# Altium PCB 蓝油白字-motor-270pcs.PcbDoc (part 1 of 2)
Units mm, origin at the board's own origin, x right, y up, seen from the top; angles counter-clockwise.
Board outline 110 x 100 mm, 4 copper layers (Top Layer, GND-A, VCC-A, Bottom Layer); 281 components, 152 nets, 782 pads, 404 vias.
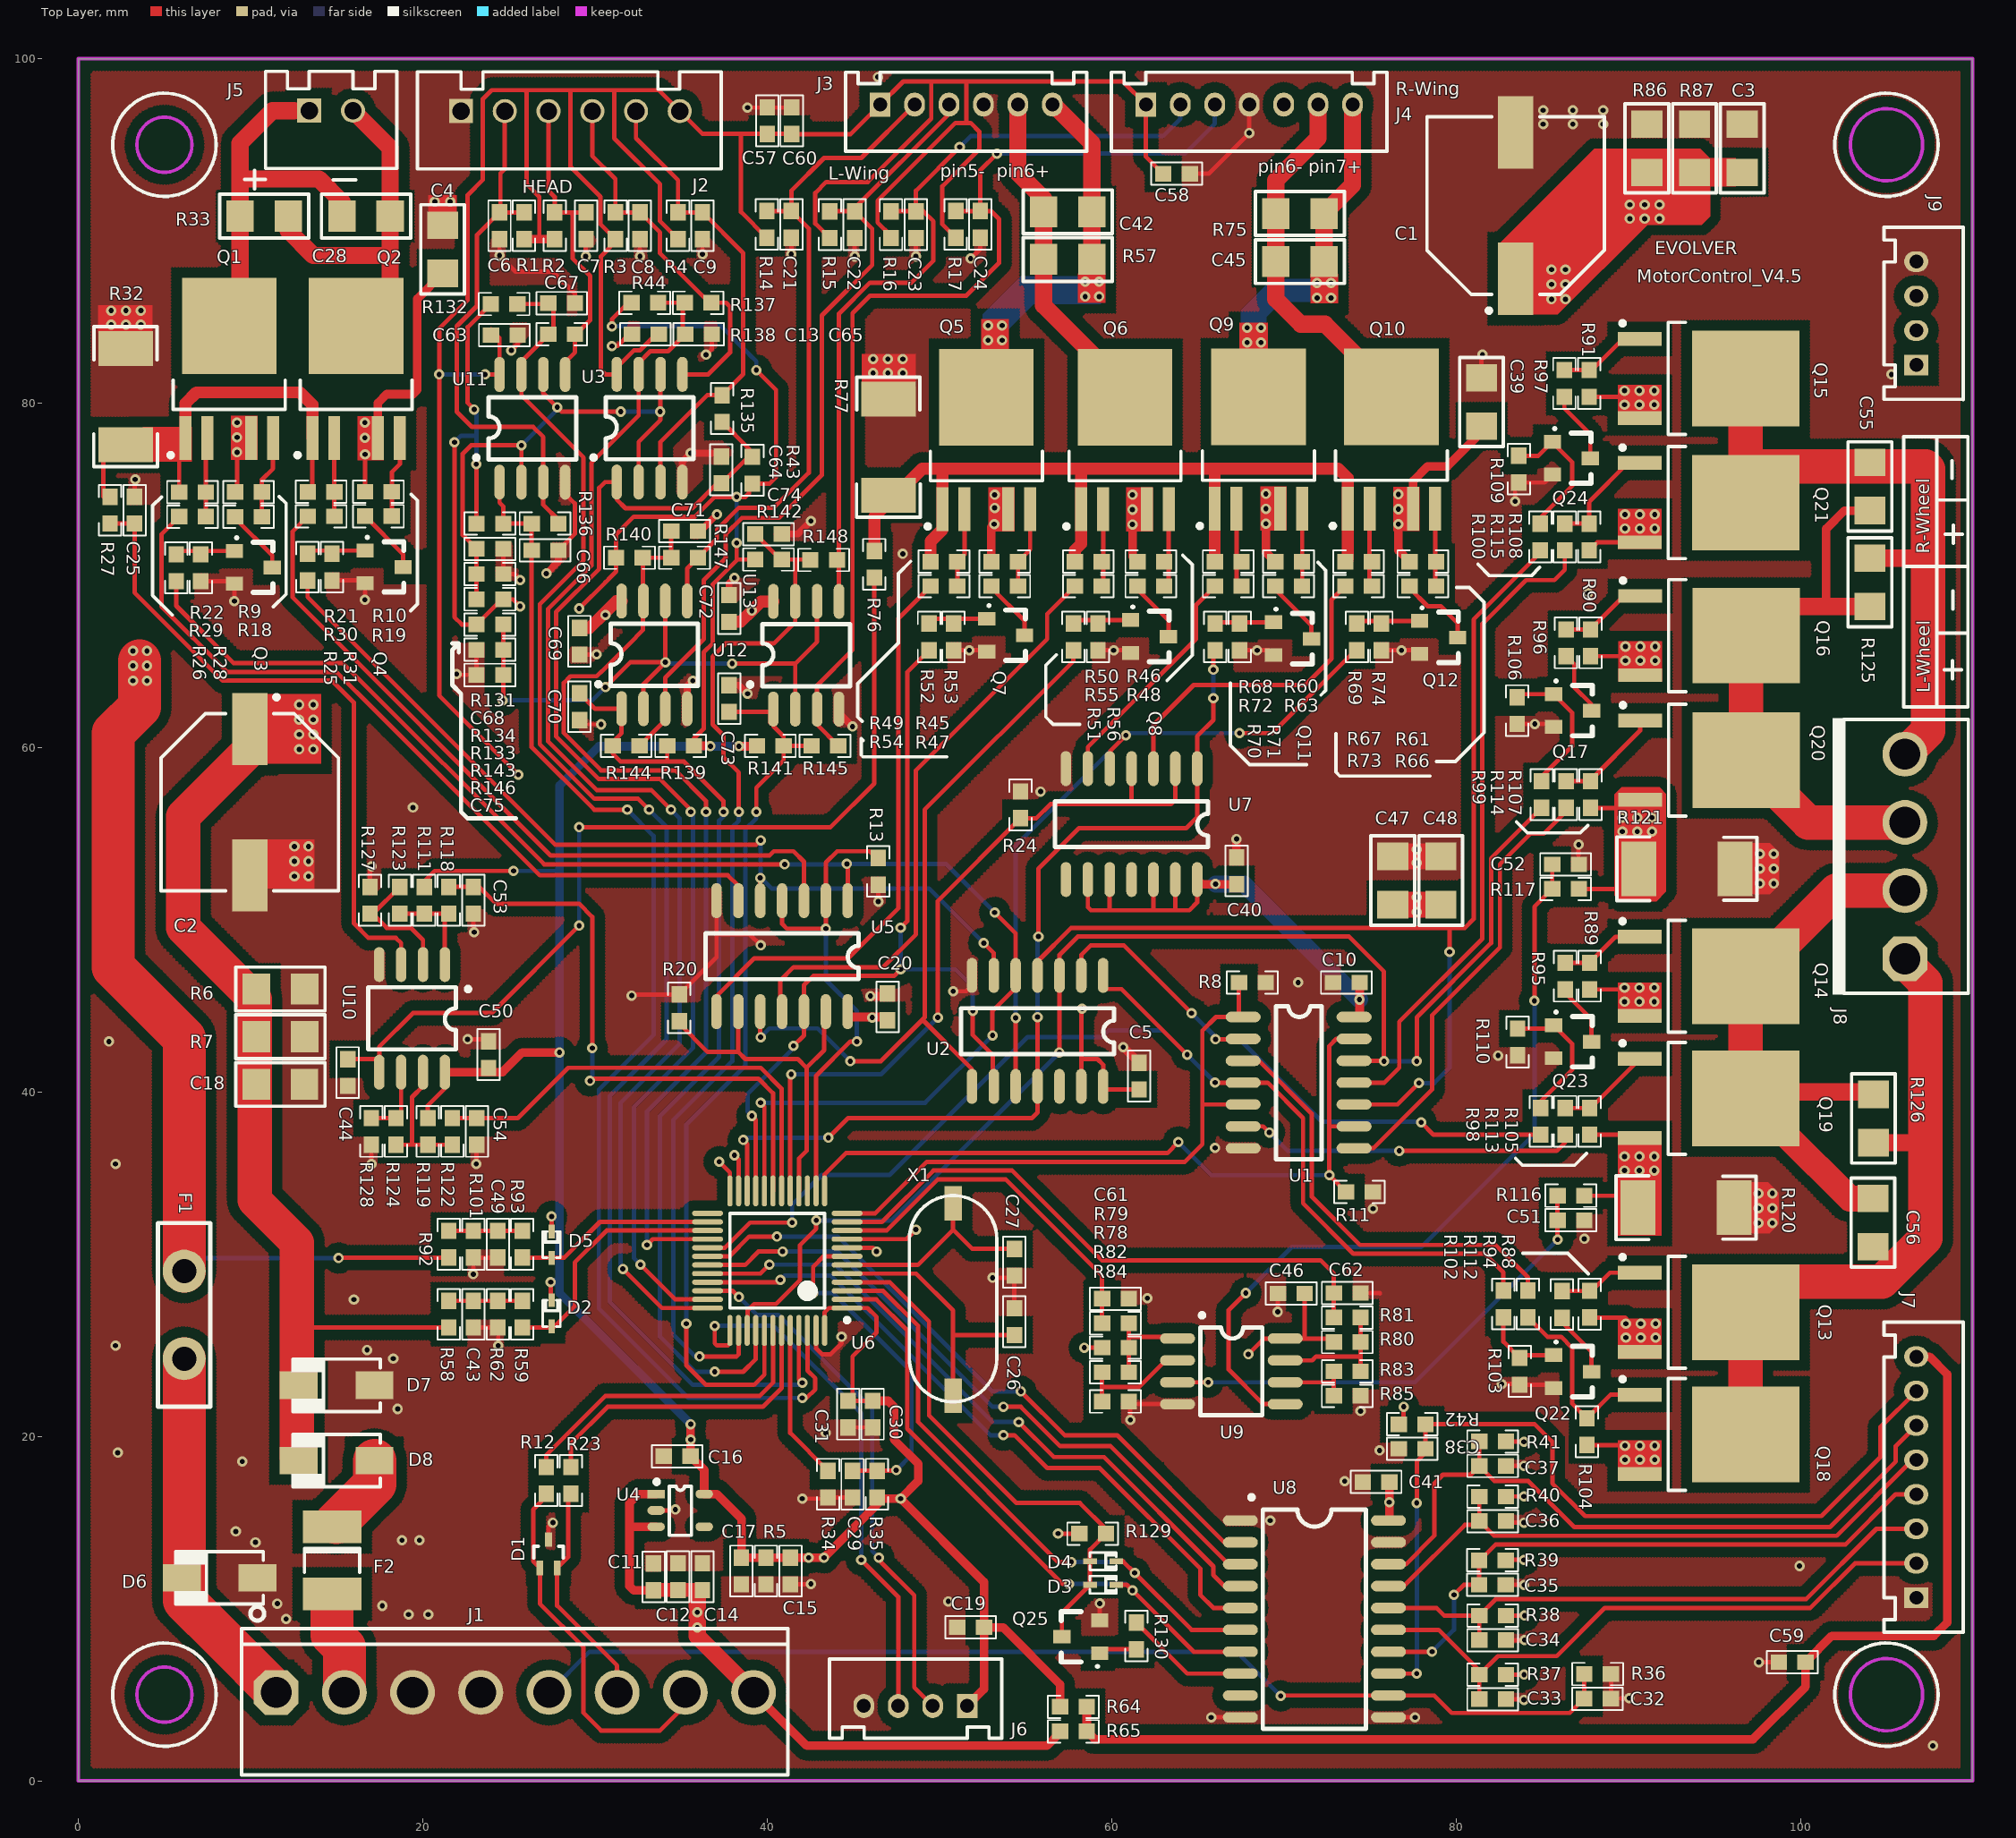
[diagram p0: Top Layer view]
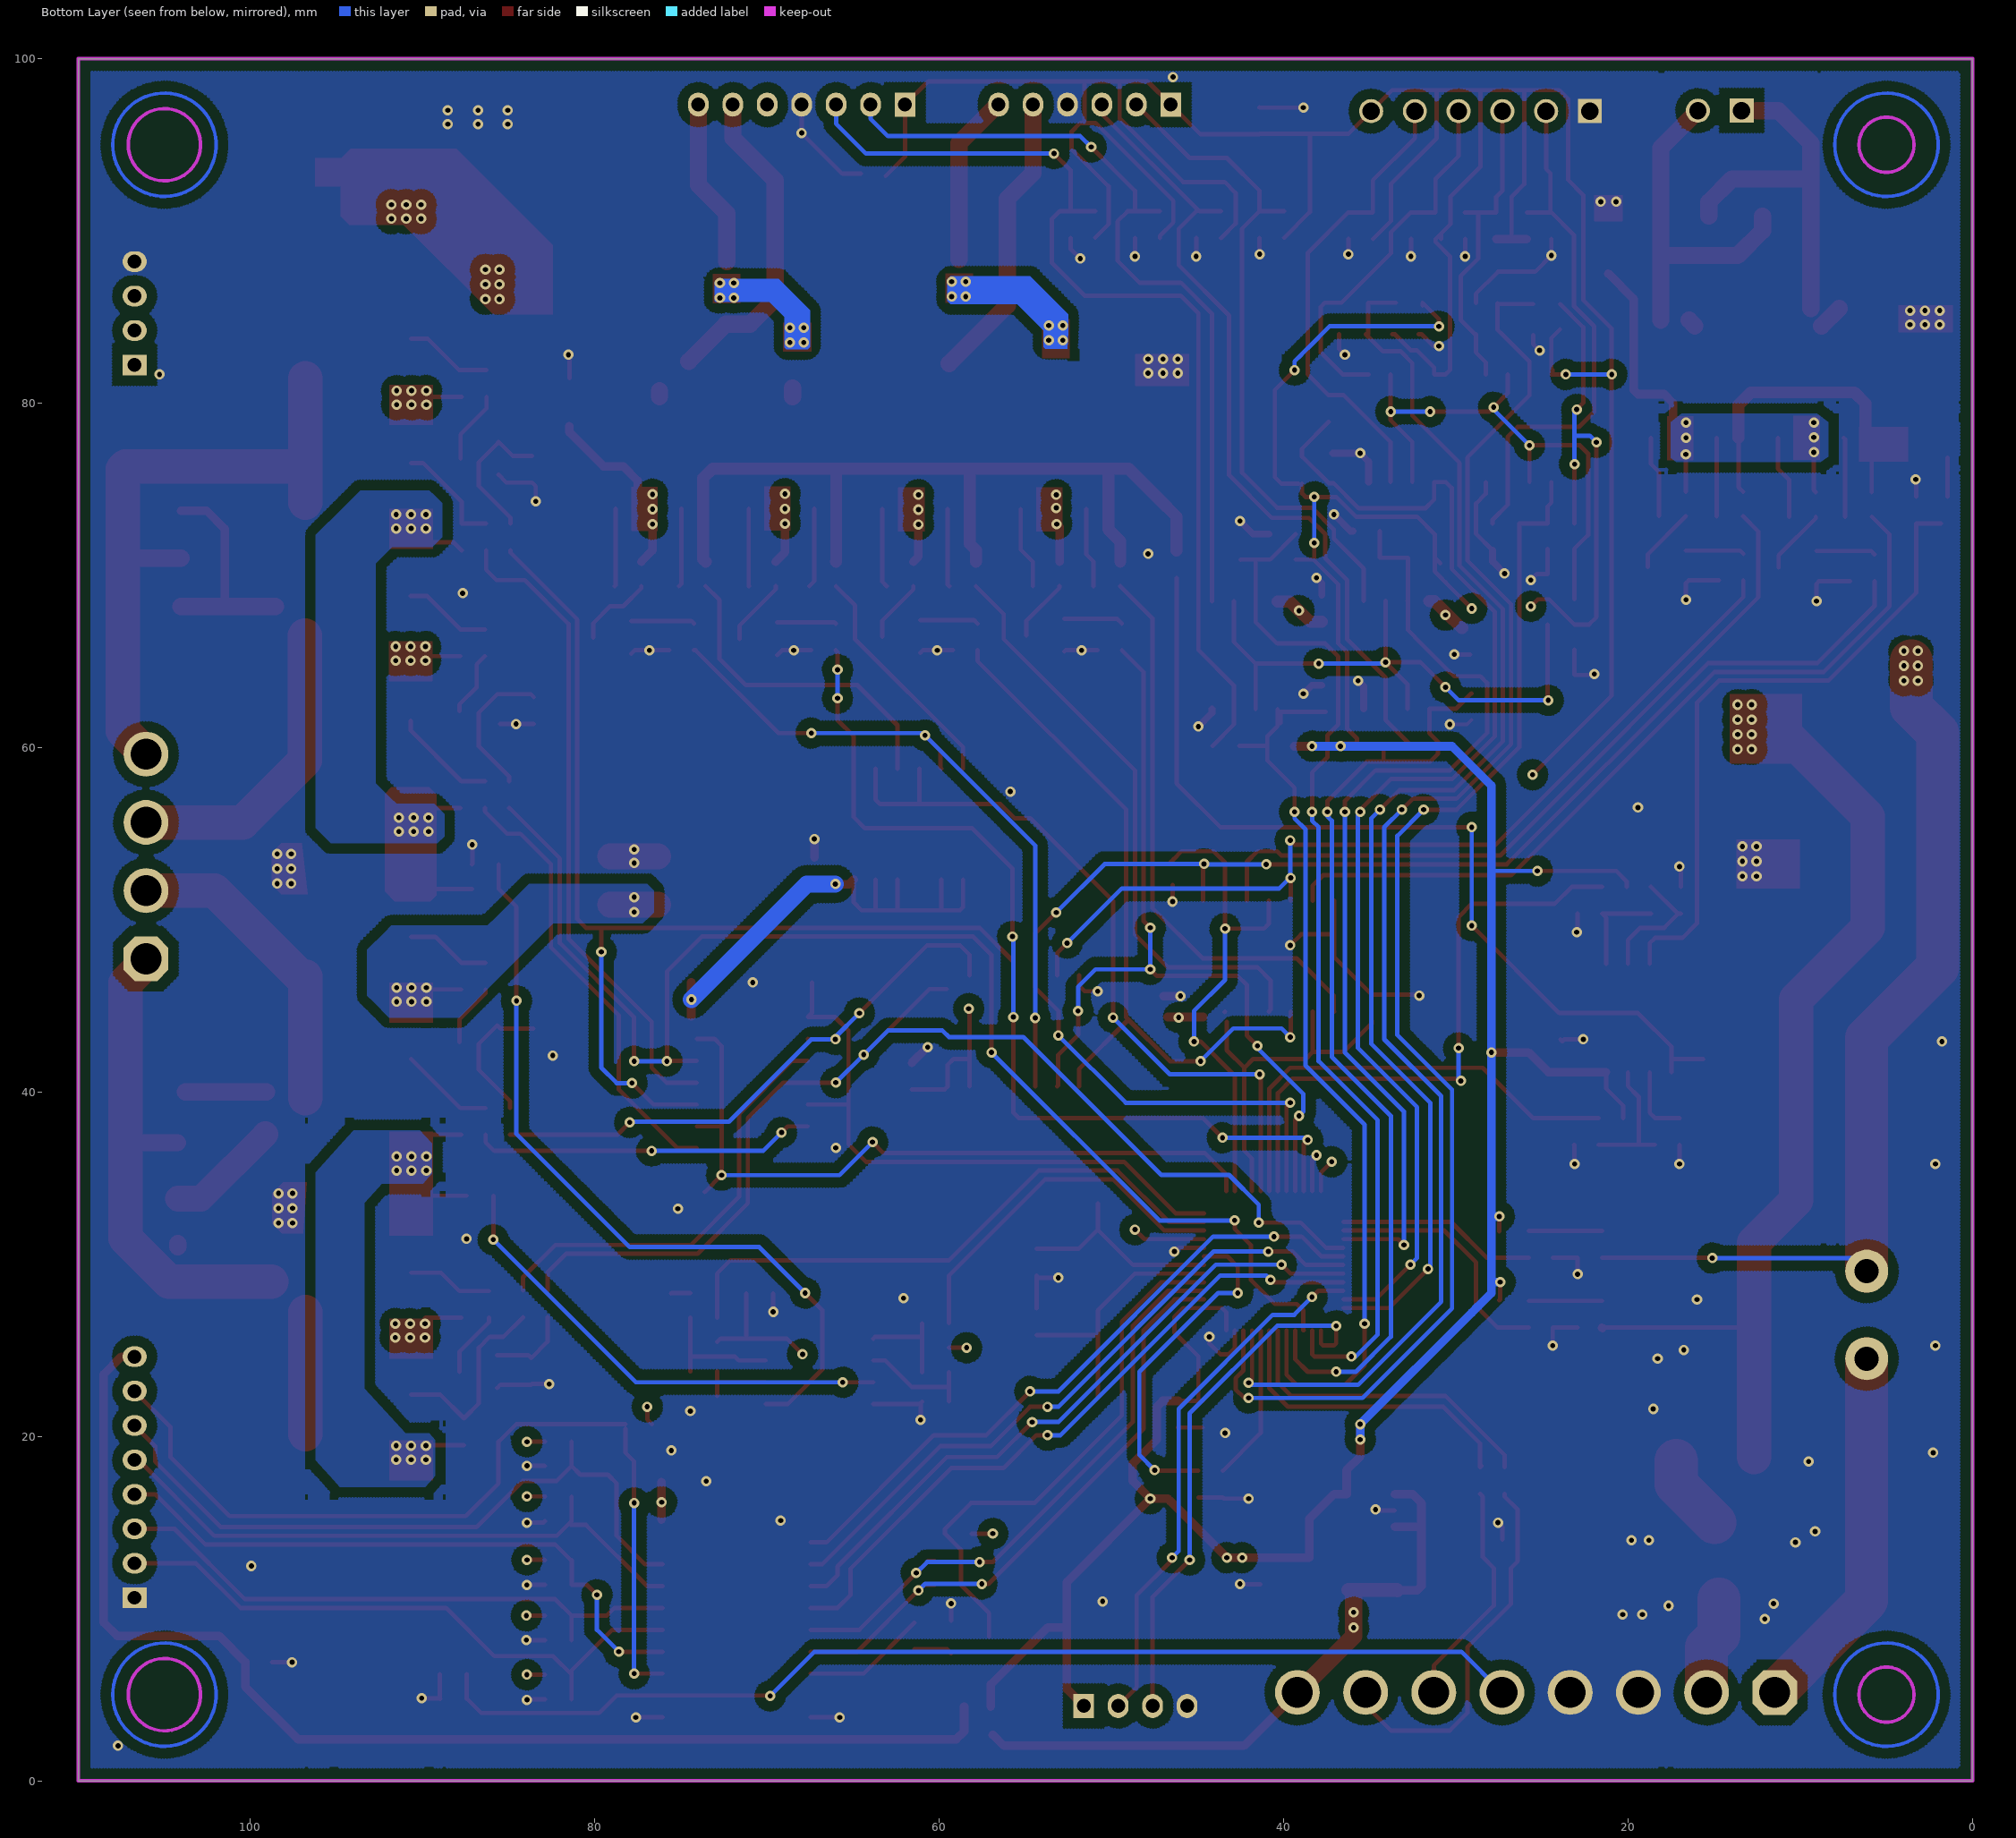
[diagram p1: Bottom Layer view, seen from below]
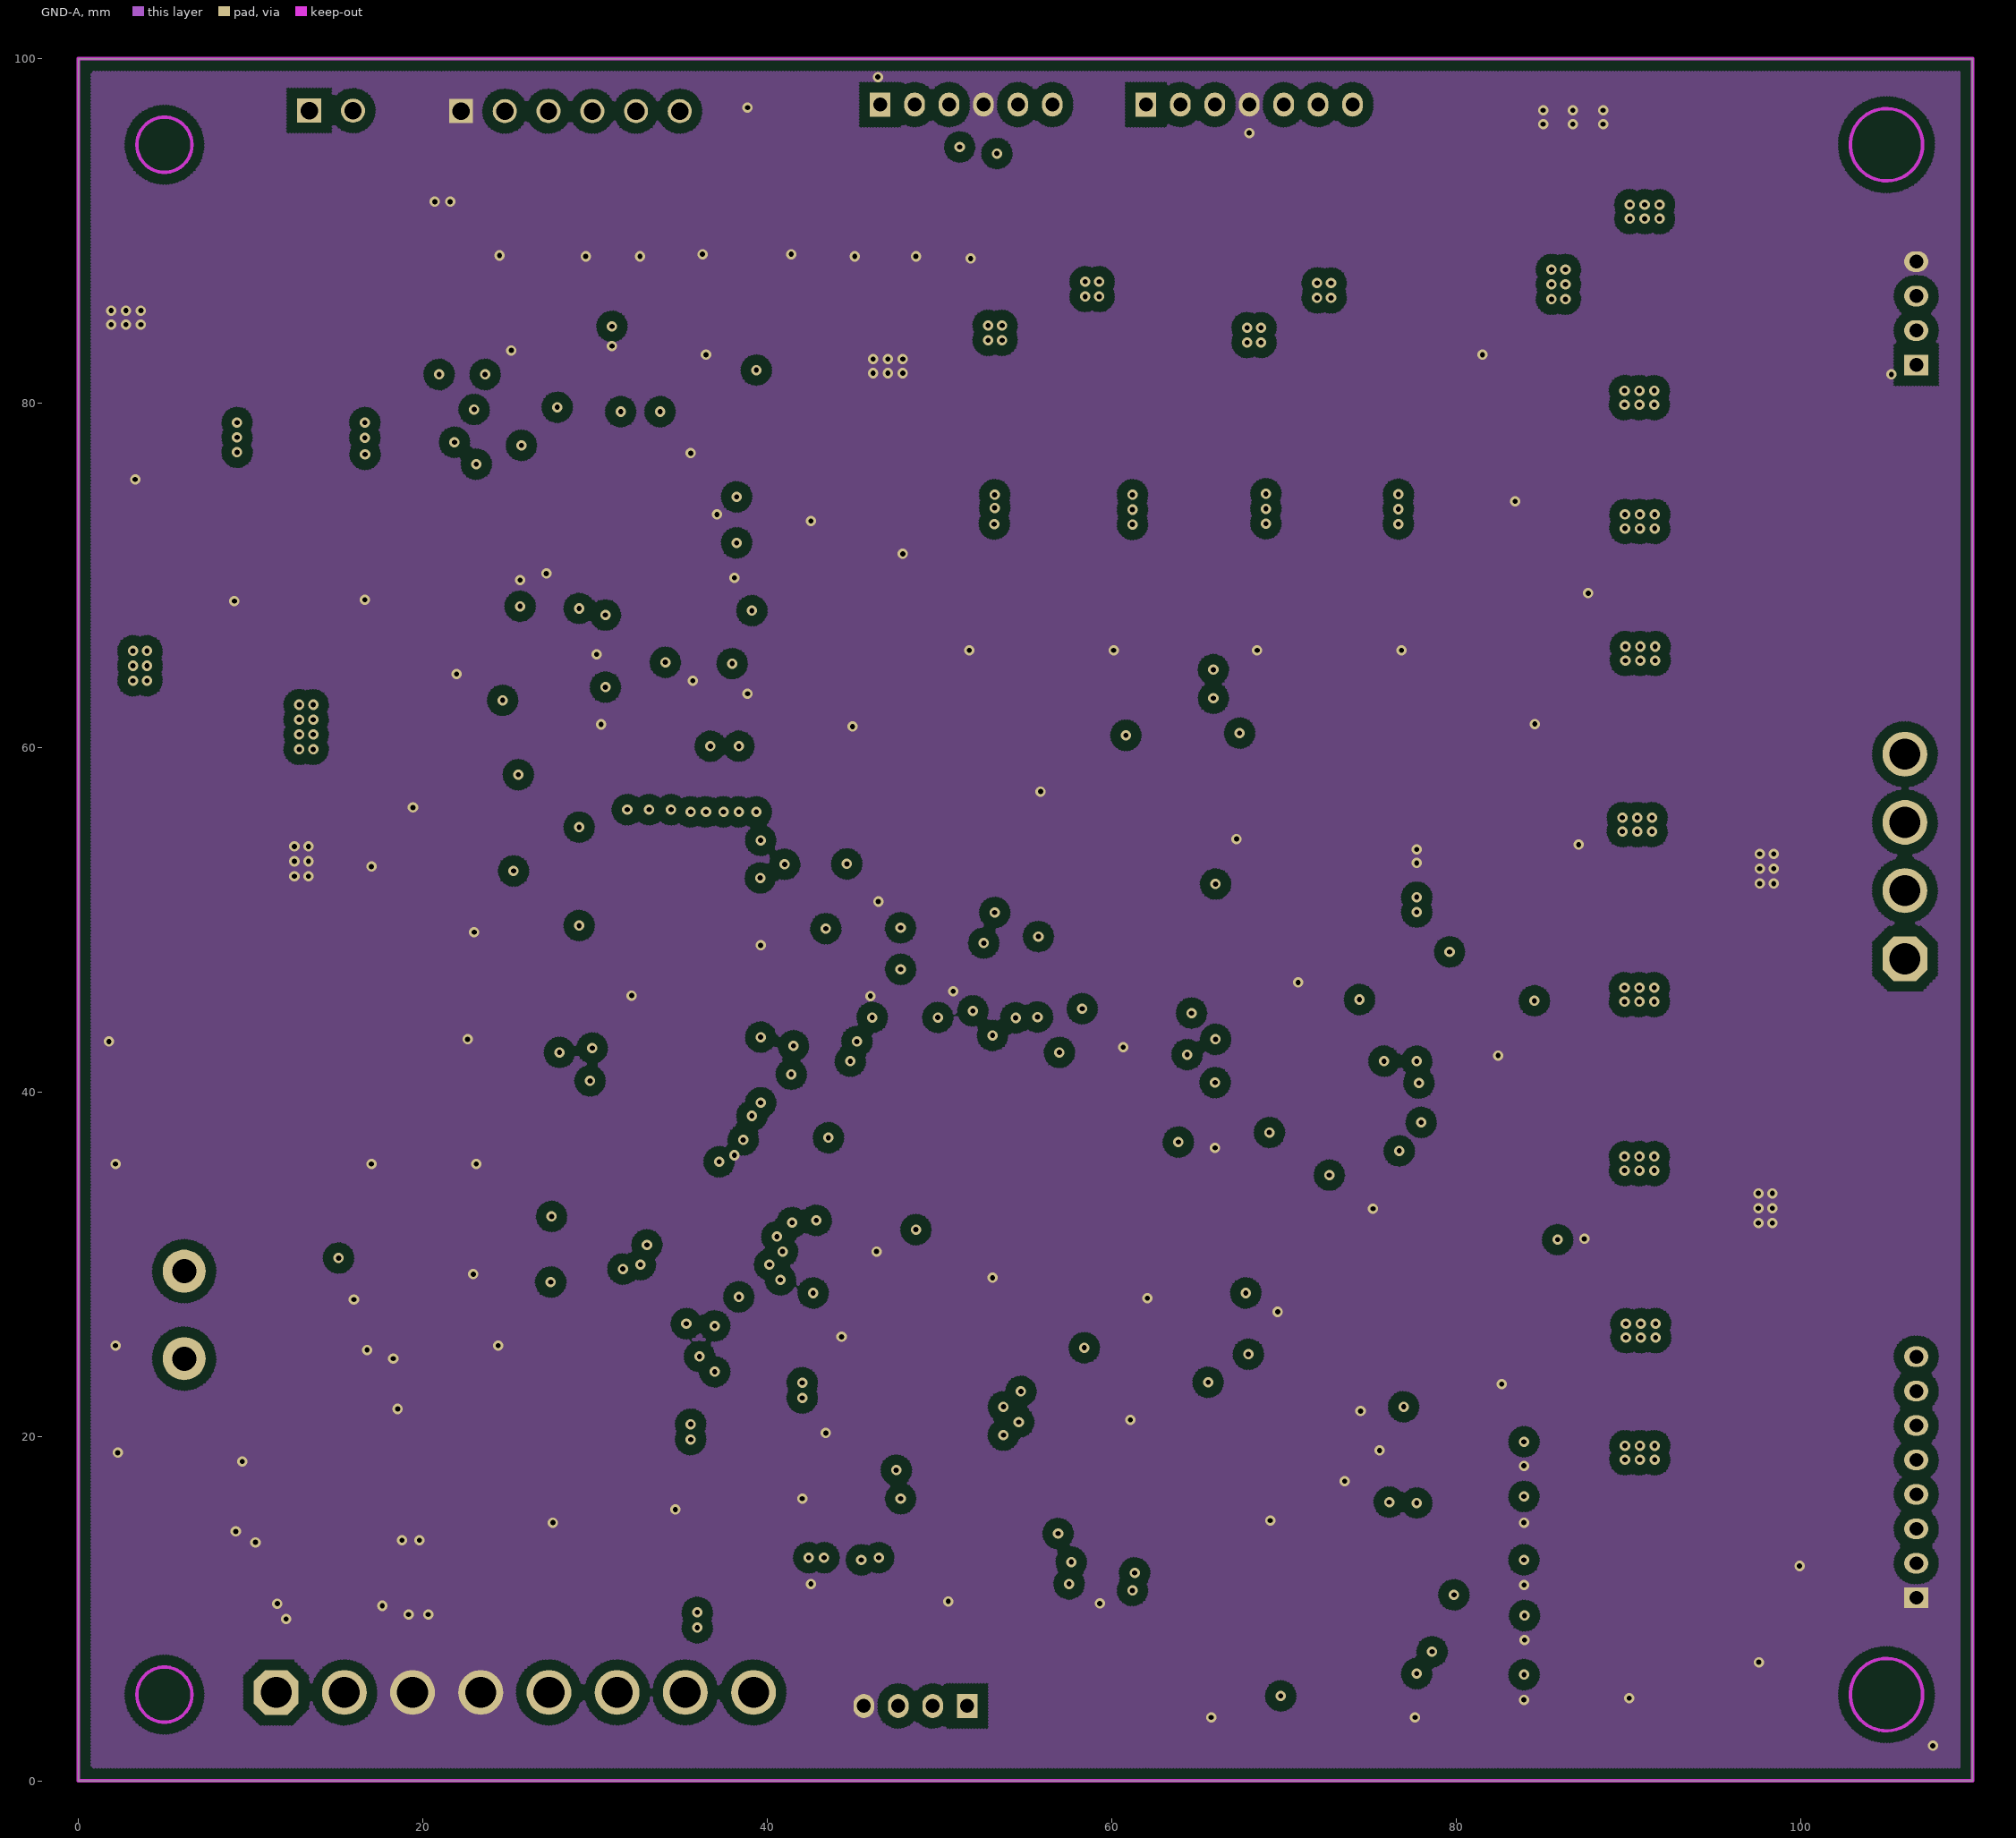
[diagram p2: GND-A]
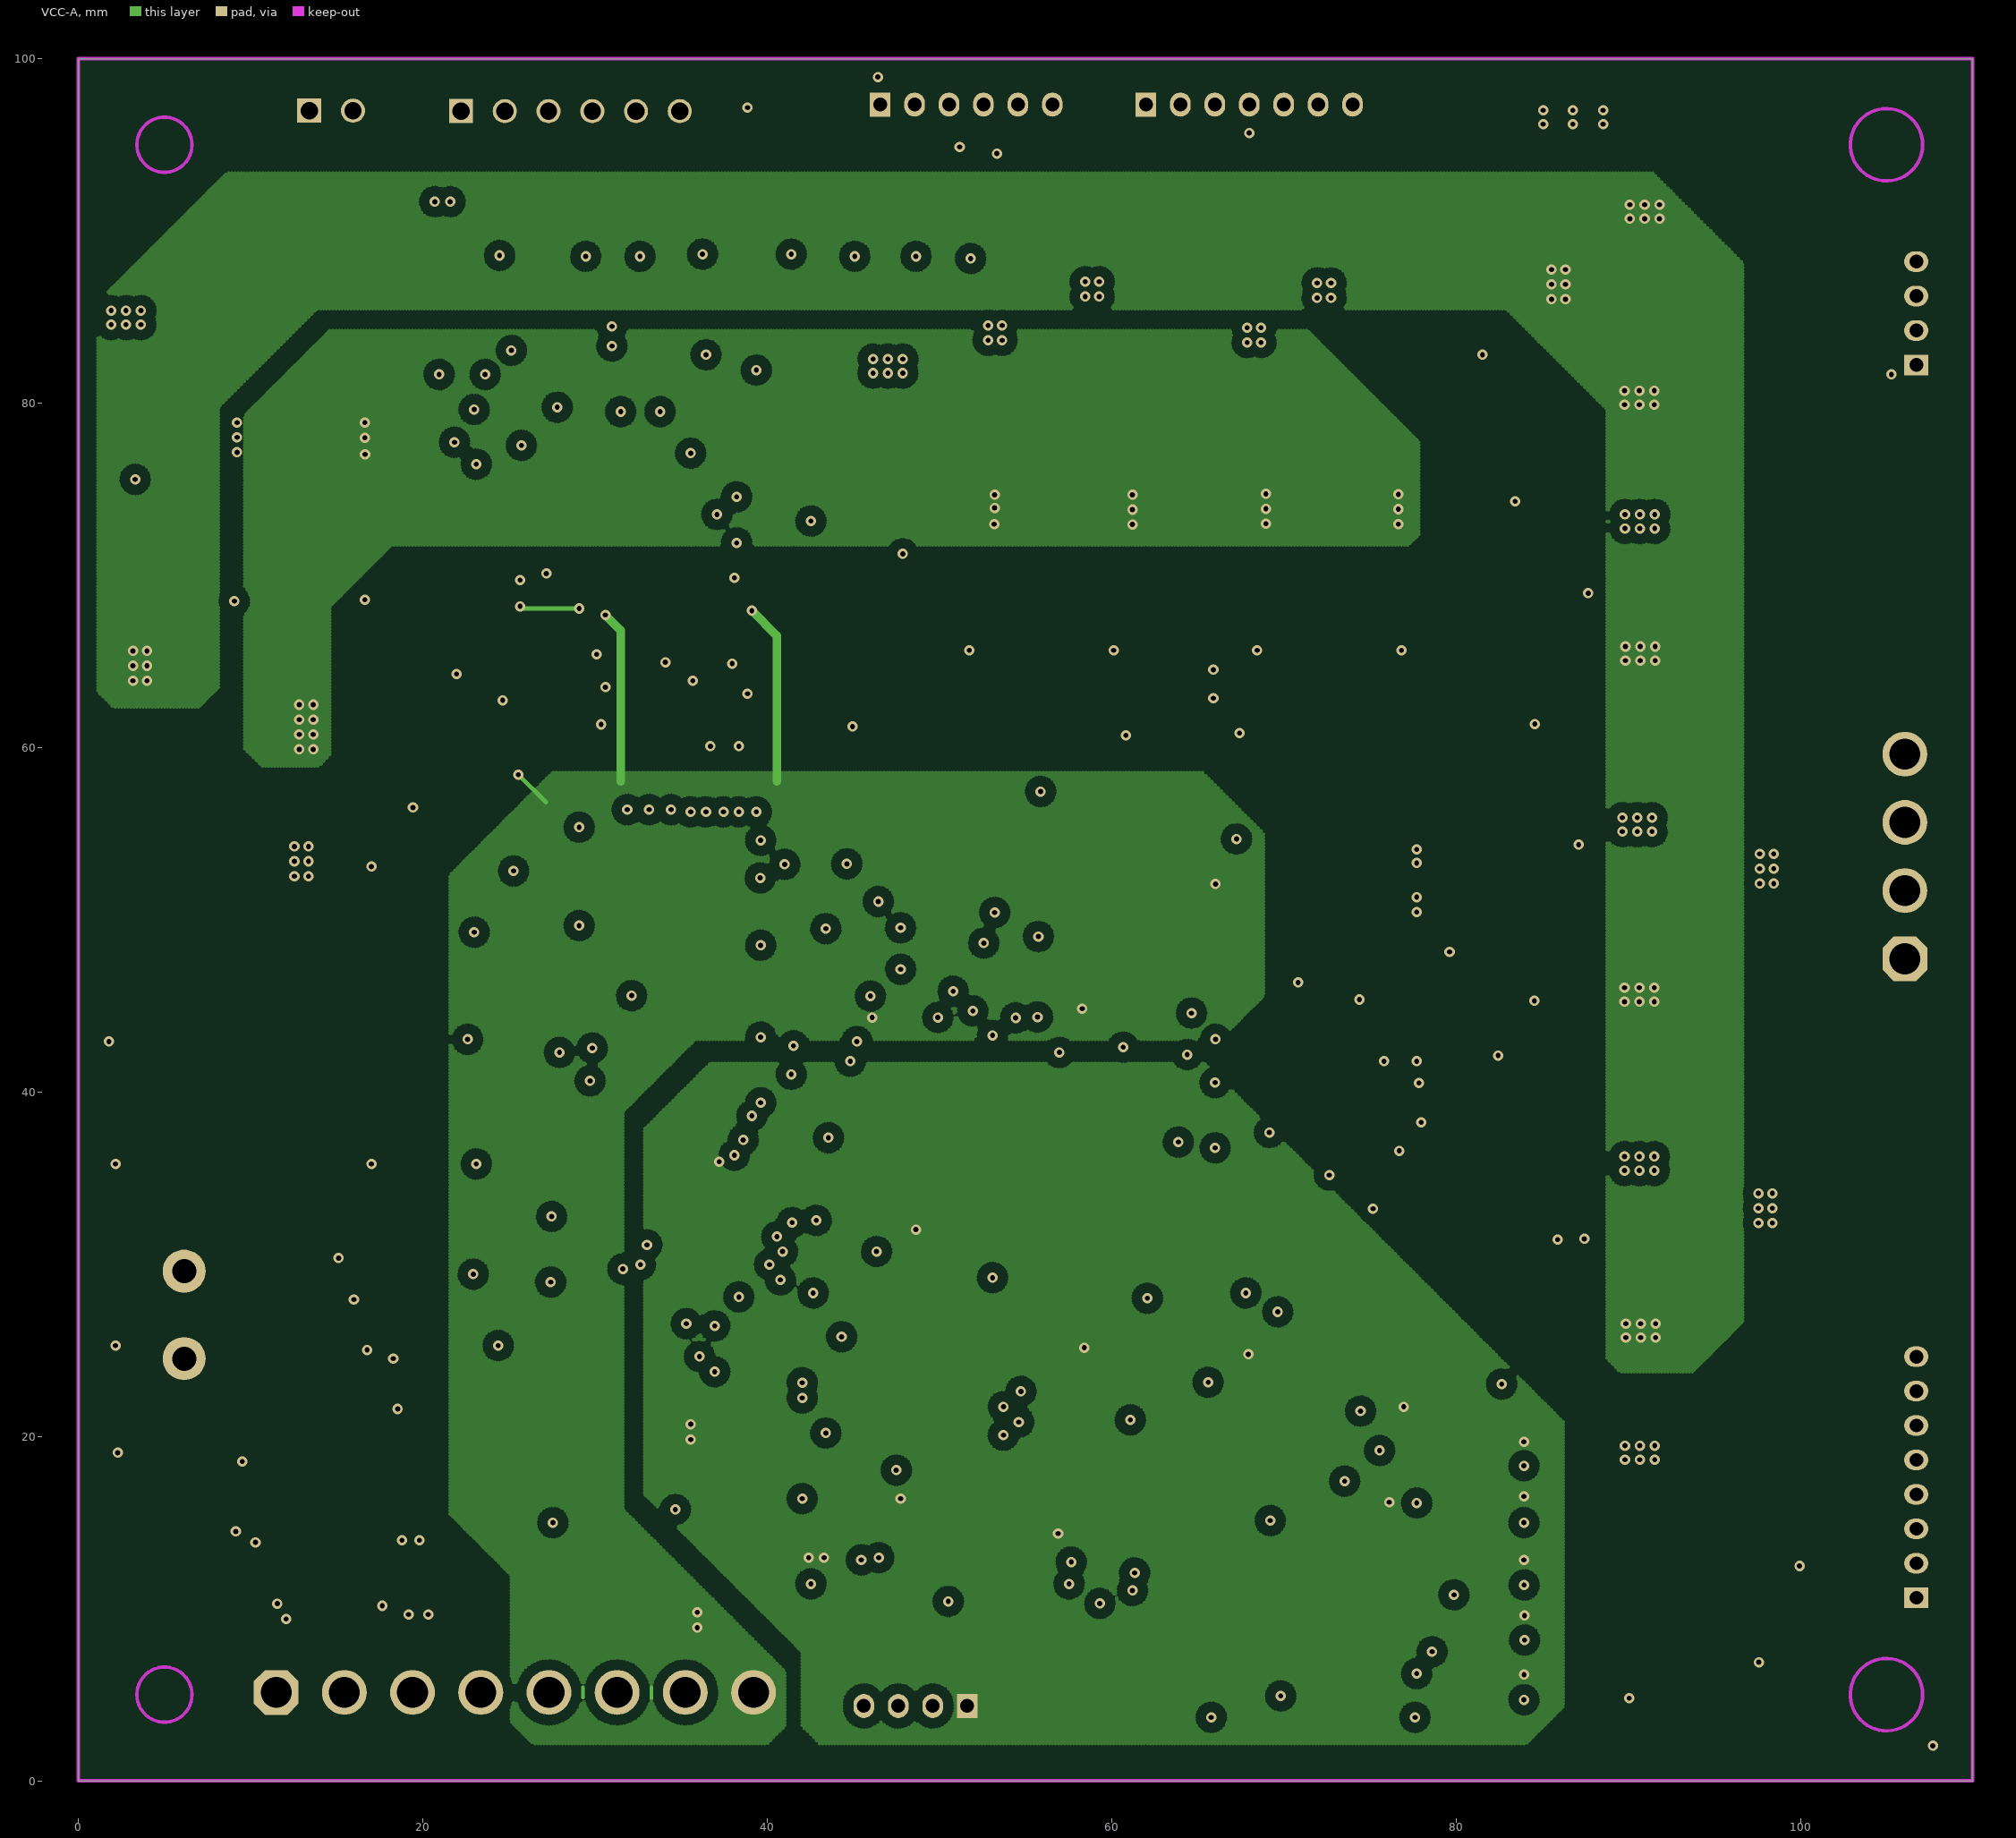
[diagram p3: VCC-A]

## Layer stack, top to bottom
Top Layer: signal copper 0.0356
Dielectric: core 0.32, FR-4, Dk 4.8
GND-A: signal copper 0.0356
Dielectric: prepreg 0.32, FR-4, Dk 4.8
VCC-A: signal copper 0.0356
Dielectric: core 0.32, FR-4, Dk 4.8
Bottom Layer: signal copper 0.0356

## Board outline
0,0 110,0 110,100 0,100

## Design rules (kind name [scope] priority, off if disabled: settings)
Clearance Clearance_1 [InPolygon] p1: gap=0.6
Clearance [All] p2: gap=0.2
ComponentClearance [All] p1: gap=0 collisioncheckmode=3 verticalgap=0 showdistances=FALSE
HoleSize [All] p1: absolutevalues=TRUE maxlimit=5 minlimit=0.025 maxpercent=80.000 minpercent=20.000
HoleToHoleClearance [All] p1: gap=0 allowstackedmicrovias=TRUE
MinimumSolderMaskSliver [All] p1: minsoldermaskwidth=0
PlaneConnect [All] p1: planeconnectstyle=Direct reliefexpansion=0.508 reliefentries=4 reliefconductorwidth=0.254 reliefairgap=0.254
PolygonConnect [All] p1: connectstyle=Direct reliefconductorwidth=0.254 reliefentries=4 polygonreliefangle="90 Angle"
RoutingVias [All] p1: holewidth=0.3 width=0.6 viastyle="Through Hole" minholewidth=0.3 minwidth=0.6 maxholewidth=0.3 maxwidth=0.6
SilkToSilkClearance [All] p1: silktosilkclearance=0
SilkscreenOverComponentPads [All] p1: minsilkscreentomaskgap=0
SolderMaskExpansion [All] p1: expansion=0
TestPointUsage [All] p1: valid=0 allowmultiple=FALSE
Testpoint [All] p1: side=3 testpointundercomponent=TRUE minsize=1.016 maxsize=2.54 preferedsize=1.524 minholesize=0 maxholesize=1.016 preferedholesize=0.813 testpointgrid=0.025 style=297 order=0123456789
Width [All] p1: maxlimit=3 minlimit=0.2 preferedwidth=0.254
17 further rules are at their usual default settings.

## Components (designator, comment, footprint, x,y, rotation, side; value= is the part's Value field where it differs from the comment)
C1 "470uF/35V" CAP_SO_10*10 83.337,87.528 r180 top
C2 "470uF/35V" CAP_SO_10*10 10.084,60.757 r0 top
C3 "C1206" 1206 96.622,94.793 r90 top
C4 "C1206" 1206 21.158,88.925 r90 top
C5 "C0603" C0603_M1608 61.595,40.919 r90 top
C6 "C0603" C0603_M1608 24.46,90.297 r270 top
C7 "C0603" C0603_M1608 29.489,90.297 r270 top
C8 "C0603" C0603_M1608 32.614,90.297 r270 top
C9 "C0603" C0603_M1608 36.246,90.297 r270 top
C10 "C0603" C0603_M1608 73.635,46.355 r180 top
C11 "C0603" C0603_M1608 33.401,11.836 r270 top
C12 "C0603" C0603_M1608 34.823,11.849 r270 top
C13 "C0603" C0603_M1608 32.931,83.998 r0 top
C14 "C0603" C0603_M1608 36.246,11.849 r270 top
C15 "C0603" C0603_M1608 41.351,12.18 r270 top
C16 "C0603" C0603_M1608 34.773,18.847 r0 top
C17 "C0603" C0603_M1608 38.506,12.18 r90 top
C18 "C1206" 1206 11.735,40.437 r0 top
C19 "C0603" C0603_M1608 51.816,8.915 r180 top
C20 "C0603" C0603_M1608 46.99,44.933 r270 top
C21 "C0603" C0603_M1608 41.402,90.373 r270 top
C22 "C0603" C0603_M1608 45.085,90.36 r270 top
C23 "C0603" C0603_M1608 48.641,90.36 r270 top
C24 "C0603" C0603_M1608 52.375,90.373 r270 top
C25 "C0603" C0603_M1608 3.266,73.778 r90 top
C26 "C0603" C0603_M1608 54.356,26.657 r270 top
C27 "C0603" C0603_M1608 54.356,30.111 r90 top
C28 "1206" 1206 16.713,90.856 r180 top
C29 "C0603" C0603_M1608 44.958,17.221 r90 top
C30 "C0603" C0603_M1608 46.126,21.285 r270 top
C31 "C0603" C0603_M1608 44.704,21.285 r270 top
C32 "C0603" C0603_M1608 88.216,4.765 r0 top
C33 "C0603" C0603_M1608 82.133,4.739 r0 top
C34 "C0603" C0603_M1608 82.133,8.168 r0 top
C35 "C0603" C0603_M1608 82.121,11.379 r0 top
C36 "C0603" C0603_M1608 82.13,15.077 r0 top
C37 "C0603" C0603_M1608 82.133,18.278 r0 top
C38 "C0603" C0603_M1608 77.457,19.279 r180 top
C39 "C1206" 1206 81.483,80.061 r90 top
C40 "C0603" C0603_M1608 67.259,52.832 r90 top
C41 "C0603" C0603_M1608 75.362,17.348 r180 top
C42 "1206" 1206 57.455,91.11 r0 top
C43 "C0603" C0603_M1608 22.936,27.089 r270 top
C44 "C0603" C0603_M1608 15.646,41.123 r270 top
C45 "1206" 1206 70.939,88.214 r0 top
C46 "C0603" C0603_M1608 70.434,28.296 r180 top
C47 "C1206" 1206 76.327,52.273 r90 top
C48 "C1206" 1206 79.121,52.273 r90 top
C49 "C0603" C0603_M1608 24.359,31.153 r270 top
C50 "C0603" C0603_M1608 23.825,42.164 r90 top
C51 "C0603" C0603_M1608 86.674,32.55 r0 top
C52 "C0603" C0603_M1608 86.367,53.211 r0 top
C53 "C0603" C0603_M1608 22.936,51.13 r270 top
C54 "C0603" C0603_M1608 23.139,37.706 r270 top
C55 "1206" 1206 104.038,75.156 r270 top
C56 "1206" 1206 104.216,32.41 r270 top
C57 "C0603" C0603_M1608 40.005,96.393 r90 top
C58 "C0603" C0603_M1608 63.779,93.32 r0 top
C59 "C0603" C0603_M1608 99.53,6.883 r180 top
C60 "C0603" C0603_M1608 41.427,96.393 r90 top
C61 "C0603" C0603_M1608 60.223,27.991 r0 top
C62 "C0603" C0603_M1608 73.685,28.321 r0 top
C63 "C0603" C0603_M1608 24.74,83.947 r180 top
C64 "C0603" C0603_M1608 37.338,76.124 r90 top
C65 "C0603" C0603_M1608 36.017,83.998 r0 top
C66 "C0603" C0603_M1608 27.102,71.45 r0 top
C67 "C0603" C0603_M1608 28.067,85.801 r0 top
C68 "C0603" C0603_M1608 23.901,71.535 r0 top
C69 "C0603" C0603_M1608 29.107,66.167 r90 top
C70 "C0603" C0603_M1608 29.107,62.368 r270 top
C71 "C0603" C0603_M1608 35.204,72.568 r0 top
C72 "C0603" C0603_M1608 37.795,68.072 r270 top
C73 "C0603" C0603_M1608 37.795,62.84 r90 top
C74 "C0603" C0603_M1608 40.081,72.39 r0 top
C75 "C0603" C0603_M1608 23.901,64.211 r180 top
D1 "RClamp0502B" SOT-523 27.305,13.183 r90 top
D2 "SOD523" SOD523 27.483,27.14 r90 top
D3 "SOD523" SOD523 59.512,11.379 r0 top
D4 "SOD523" SOD523 59.512,12.751 r0 top
D5 "SOD523" SOD523 27.483,31.128 r90 top
D6 "SMA DO-214AC" "SMA DO-214AC" 8.204,11.786 r180 top
D7 "SMA DO-214AC" "SMA DO-214AC" 14.996,22.962 r180 top
D8 "SMA DO-214AC" "SMA DO-214AC" 14.996,18.593 r180 top
F1 "BK30-400" FUSE-FRG-5MM 6.147,27.051 r270 top
F2 "1812" 1812 14.732,12.802 r270 top
J1 "VH3.96-8P" VH3.96-8P 23.368,5.131 r0 top
J2 "XH2.54-6" XH2.54-6 28.575,96.952 r0 top
J3 "PH2.0-6P" PH2.0-6P 51.562,97.333 r0 top
J4 "PH2.0-7P" PH2.0-7P 67.996,97.333 r0 top
J5 "XH2.54-2" XH2.54-2 14.681,96.977 r0 top
J6 "PH2.0-4P" PH2.0-4P 48.616,4.343 r180 top
J7 "PH2.0-8P" PH2.0-8P 106.731,17.628 r90 top
J8 "VH3.96-4P" VH3.96-4P 106.07,53.67 r90 top
J9 "PH2.0-4P" PH2.0-4P 106.731,85.214 r90 top
Q1 "TO-252-4" TO-252-4L 6.223,77.978 r90 top
Q2 "TO-252-4" TO-252-4L 13.589,77.978 r90 top
Q3 "SOT-23" SOT-23_L 10.16,70.46 r0 top
Q4 "SOT-23" SOT-23_L 17.755,70.485 r0 top
Q5 "TO-252-4" TO-252-4L 50.19,73.838 r90 top
Q6 "TO-252-4" TO-252-4L 58.242,73.838 r90 top
Q7 "SOT-23" SOT-23_L 53.848,66.523 r0 top
Q8 "SOT-23" SOT-23_L 62.205,66.446 r0 top
Q9 "TO-252-4" TO-252-4L 65.989,73.863 r90 top
Q10 "TO-252-4" TO-252-4L 73.711,73.863 r90 top
Q11 "SOT-23" SOT-23_L 70.51,66.319 r0 top
Q12 "SOT-23" SOT-23_L 78.994,66.396 r0 top
Q13 "D-PAK" TO-252-2L 94.675,27.203 r0 top
Q14 "D-PAK" TO-252-2L 94.675,46.711 r0 top
Q15 "D-PAK" TO-252-2L 94.675,81.432 r0 top
Q16 "D-PAK" TO-252-2L 94.7,66.497 r0 top
Q17 "SOT-23" SOT-23_L 86.775,62.141 r0 top
Q18 "D-PAK" TO-252-2L 94.675,20.117 r0 top
Q19 "D-PAK" TO-252-2L 94.675,39.624 r0 top
Q20 "D-PAK" TO-252-2L 94.7,59.258 r0 top
Q21 "D-PAK" TO-252-2L 94.675,74.219 r0 top
Q22 "SOT-23" SOT-23_L 86.775,23.762 r0 top
Q23 "SOT-23" SOT-23_L 86.775,42.914 r0 top
Q24 "SOT-23" SOT-23_L 86.699,76.797 r0 top
Q25 "SOT-23" SOT-23_L 58.217,8.357 r180 top
R1 "R0603" 0603 25.883,90.297 r270 top
R2 "R0603" 0603 27.661,90.297 r270 top
R3 "R0603" 0603 31.191,90.297 r270 top
R4 "R0603" 0603 34.823,90.297 r270 top
R5 "R0603" 0603 39.929,12.18 r90 top
R6 "R1206" 1206 11.738,45.974 r180 top
R7 "R1206" 1206 11.738,43.205 r180 top
R8 "R0603" 0603 68.174,46.355 r0 top
R9 "R0603" 0603 9.884,74.833 r180 top
R10 "R0603" 0603 17.426,74.856 r180 top
R11 "R0603" 0603 74.397,34.188 r0 top
R12 "R0603" 0603 27.178,17.438 r270 top
R13 "R0603" 0603 46.457,52.807 r270 top
R14 "R0603" 0603 39.98,90.373 r270 top
R15 "R0603" 0603 43.637,90.36 r270 top
R16 "R0603" 0603 47.193,90.36 r270 top
R17 "R0603" 0603 50.952,90.373 r270 top
R18 "R0603" 0603 9.882,73.396 r0 top
R19 "R0603" 0603 17.426,73.434 r0 top
R20 "R0603" 0603 34.9,44.882 r90 top
R21 "R0603" 0603 14.099,74.843 r180 top
R22 "R0603" 0603 6.629,74.828 r180 top
R23 "R0603" 0603 28.6,17.438 r270 top
R24 "R0603" 0603 54.712,56.667 r90 top
R25 "R0603" 0603 13.311,70.475 r90 top
R26 "R0603" 0603 5.69,70.434 r270 top
R27 "R0603" 0603 1.844,73.778 r90 top
R28 "R0603" 0603 7.112,70.434 r90 top
R29 "R0603" 0603 6.629,73.406 r180 top
R30 "R0603" 0603 14.099,73.421 r180 top
R31 "R0603" 0603 14.734,70.475 r270 top
R32 "R2512" R2512 2.743,77.572 r90 top
R33 "R1206" 1206 10.795,90.856 r180 top
R34 "R0603" 0603 43.536,17.221 r90 top
R35 "R0603" 0603 46.38,17.221 r270 top
R36 "R0603" 0603 88.227,6.198 r180 top
R37 "R0603" 0603 82.133,6.162 r0 top
R38 "R0603" 0603 82.133,9.591 r0 top
R39 "R0603" 0603 82.121,12.802 r0 top
R40 "R0603" 0603 82.13,16.5 r0 top
R41 "R0603" 0603 82.133,19.7 r0 top
R42 "R0603" 0603 77.457,20.701 r180 top
R43 "R0603" 0603 39.141,76.098 r270 top
R44 "R0603" 0603 32.893,85.827 r180 top
R45 "R0603" 0603 53.797,70.79 r180 top
R46 "R0603" 0603 62.281,70.79 r180 top
R47 "R0603" 0603 53.797,69.367 r0 top
R48 "R0603" 0603 62.281,69.367 r0 top
R49 "R0603" 0603 50.267,70.79 r0 top
R50 "R0603" 0603 58.649,70.79 r0 top
R51 "R0603" 0603 57.785,66.421 r90 top
R52 "R0603" 0603 49.403,66.421 r270 top
R53 "R0603" 0603 50.825,66.421 r90 top
R54 "R0603" 0603 50.267,69.367 r180 top
R55 "R0603" 0603 58.649,69.367 r180 top
R56 "R0603" 0603 59.207,66.421 r90 top
R57 "R1206" 1206 57.455,88.341 r0 top
R58 "R0603" 0603 21.514,27.089 r270 top
R59 "R0603" 0603 25.781,27.089 r90 top
R60 "R0603" 0603 70.282,70.79 r180 top
R61 "R0603" 0603 78.08,70.79 r180 top
R62 "R0603" 0603 24.359,27.089 r90 top
R63 "R0603" 0603 70.282,69.367 r0 top
R64 "R0603" 0603 57.785,4.293 r180 top
R65 "R0603" 0603 57.785,2.87 r180 top
R66 "R0603" 0603 78.08,69.367 r0 top
R67 "R0603" 0603 74.346,70.79 r0 top
R68 "R0603" 0603 66.777,70.79 r0 top
R69 "R0603" 0603 74.244,66.421 r90 top
R70 "R0603" 0603 66.015,66.421 r270 top
R71 "R0603" 0603 67.437,66.421 r90 top
R72 "R0603" 0603 66.777,69.367 r180 top
R73 "R0603" 0603 74.346,69.367 r180 top
R74 "R0603" 0603 75.667,66.421 r90 top
R75 "R1206" 1206 70.939,91.008 r0 top
R76 "R0603" 0603 46.228,70.637 r90 top
R77 "R2512" R2512 47.041,74.651 r90 top
R78 "R0603" 0603 60.223,25.146 r0 top
R79 "R0603" 0603 60.223,26.568 r180 top
R80 "R0603" 0603 73.685,25.476 r0 top
R81 "R0603" 0603 73.685,26.899 r0 top
R82 "R0603" 0603 60.223,23.724 r180 top
R83 "R0603" 0603 73.685,23.774 r180 top
R84 "R0603" 0603 60.223,22.022 r0 top
R85 "R0603" 0603 73.685,22.352 r0 top
R86 "R1206" 1206 91.084,94.793 r270 top
R87 "R1206" 1206 93.853,94.793 r270 top
R88 "R0603" 0603 87.766,27.674 r270 top
R89 "R0603" 0603 87.766,46.724 r270 top
R90 "R0603" 0603 87.817,66.078 r270 top
R91 "R0603" 0603 87.741,81.141 r270 top
R92 "R0603" 0603 21.514,31.153 r270 top
R93 "R0603" 0603 25.781,31.153 r90 top
R94 "R0603" 0603 86.157,27.661 r90 top
R95 "R0603" 0603 86.344,46.724 r90 top
R96 "R0603" 0603 86.394,66.078 r90 top
R97 "R0603" 0603 86.293,81.141 r90 top
R98 "R0603" 0603 84.921,38.291 r90 top
R99 "R0603" 0603 84.972,57.265 r270 top
R100 "R0603" 0603 84.896,72.225 r90 top
R101 "R0603" 0603 22.936,31.153 r90 top
R102 "R0603" 0603 82.753,27.686 r90 top
R103 "R0603" 0603 83.702,23.774 r90 top
R104 "R0603" 0603 87.605,20.269 r270 top
R105 "R0603" 0603 87.766,38.291 r270 top
R106 "R0603" 0603 83.55,62.141 r90 top
R107 "R0603" 0603 87.817,57.265 r270 top
R108 "R0603" 0603 87.741,72.225 r270 top
R109 "R0603" 0603 83.651,76.162 r90 top
R110 "R0603" 0603 83.575,42.901 r90 top
R111 "R0603" 0603 20.091,51.13 r90 top
R112 "R0603" 0603 84.176,27.686 r270 top
R113 "R0603" 0603 86.344,38.291 r90 top
R114 "R0603" 0603 86.394,57.265 r90 top
R115 "R0603" 0603 86.318,72.225 r90 top
R116 "R0603" 0603 86.674,33.973 r180 top
R117 "R0603" 0603 86.367,51.789 r180 top
R118 "R0603" 0603 21.514,51.13 r90 top
R119 "R0603" 0603 20.295,37.706 r90 top
R120 "R2512" R2512 90.56,33.274 r0 top
R121 "R2512" R2512 90.611,52.959 r0 top
R122 "R0603" 0603 21.717,37.706 r270 top
R123 "R0603" 0603 18.669,51.13 r270 top
R124 "R0603" 0603 18.44,37.706 r270 top
R125 "R1206" 1206 104.038,69.593 r270 top
R126 "R1206" 1206 104.242,38.456 r270 top
R127 "R0603" 0603 16.942,51.13 r270 top
R128 "R0603" 0603 17.018,37.706 r90 top
R129 "R0603" 0603 58.903,14.351 r0 top
R130 "R0603" 0603 61.443,8.407 r90 top
R131 "R0603" 0603 23.901,73 r180 top
R132 "R0603" 0603 24.727,85.75 r180 top
R133 "R0603" 0603 23.901,68.605 r0 top
R134 "R0603" 0603 23.901,70.07 r180 top
R135 "R0603" 0603 37.389,79.68 r90 top
R136 "R0603" 0603 27.102,73 r0 top
R137 "R0603" 0603 35.992,85.827 r0 top
R138 "R0603" 0603 28.067,83.998 r0 top
R139 "R0603" 0603 34.976,60.096 r0 top
R140 "R0603" 0603 32.004,71.018 r180 top
R141 "R0603" 0603 40.183,60.096 r180 top
R142 "R0603" 0603 40.081,70.917 r180 top
R143 "R0603" 0603 23.901,67.141 r180 top
R144 "R0603" 0603 31.813,60.096 r0 top
R145 "R0603" 0603 43.358,60.096 r0 top
R146 "R0603" 0603 23.901,65.676 r0 top
R147 "R0603" 0603 35.204,71.018 r0 top
R148 "R0603" 0603 43.282,70.891 r0 top
U1 "SO-14" SO-14 67.64,44.348 r0 top
U2 "SO-14" SO-14 59.512,46.761 r270 top
U3 "SO-8" SO-8 31.267,75.413 r90 top
U4 "XC6503D331" SOT23-5 34.95,15.697 r0 top
U5 "SO-14" SO-14 44.679,51.105 r270 top
U6 "LQFP48_N" LQFP48_N 40.589,30.201 r180 top
U7 "SO-14" SO-14 64.973,58.776 r270 top
U8 "SOP-20" SOP-20 71.78,9.398 r0 top
U9 "SO-8" SO-8 63.83,25.679 r0 top
U10 "SO-8" SO-8 21.285,47.396 r270 top
U11 "SO-8" SO-8 24.46,75.408 r90 top
U12 "SO-8" SO-8 31.547,62.251 r90 top
U13 "SO-8" SO-8 40.361,62.23 r90 top
X1 "8M" HC-49SMD 50.8,27.94 r270 top

## Footprints (in the part's own frame and the unit in brackets; to place one, negate y for a bottom-side part, rotate by r counter-clockwise, add the part's x,y. Pads: shape width x height; smd on the part's side, far side on the other; paste and mask are expansions set on the pad)
0603 [mm]
  rect 0.95x0.9 smd: 1(-0.775,0) 2(0.775,0)
  silkscreen extent -1.48,-0.65 1.48,0.65
1206 [mm] "3216mm"
  rect 1.6x1.8 smd: 1(-1.4,0) 2(1.4,0)
  silkscreen extent -2.59,-1.27 2.59,1.27
1812 [mm] "Chip Capacitor; Body 4.5 x 3.2 mm (LxW typ)"
  rect 1.9x3.4 smd: 1(-1.95,0) 2(1.95,0)
  silkscreen extent -0.7,-1.6 0.7,1.6
C0603_M1608 [mm] "Chip Capacitor, 2-Leads, Body 1.6x0.8mm, IPC Medium Density"
  rect 0.95x0.9 smd: 1(-0.775,0) 2(0.775,0)
  silkscreen extent -1.48,-0.65 1.48,0.65
CAP_SO_10*10 [mm]
  rect 2.05x4.2 smd: 1(-0.127,0.313) 2(-0.127,-8.187)
  silkscreen extent -5.28,-9.09 5.02,2.29
FUSE-FRG-5MM [mm]
  round 2.5 hole 1.4: 1(-2.54,0) 2(2.54,0)
  silkscreen extent -5.33,-1.52 5.33,1.52
HC-49SMD [mm]
  rect 2x1 smd: 1(-5.588,0) 2(5.588,0)
  silkscreen extent -6.04,-2.54 5.94,2.54
LQFP48_N [mm]
  oval 1.8x0.3 smd: 1(-4.05,2.75) 2(-4.05,2.25) 3(-4.05,1.75) 4(-4.05,1.25) 5(-4.05,0.75) 6(-4.05,0.25) 7(-4.05,-0.25) 8(-4.05,-0.75) 9(-4.05,-1.25) 10(-4.05,-1.75) 11(-4.05,-2.25) 12(-4.05,-2.75) 25(4.05,-2.75) 26(4.05,-2.25) 27(4.05,-1.75) 28(4.05,-1.25) 29(4.05,-0.75) 30(4.05,-0.25) 31(4.05,0.25) 32(4.05,0.75) 33(4.05,1.25) 34(4.05,1.75) 35(4.05,2.25) 36(4.05,2.75)
  oval 0.3x1.8 smd: 13(-2.75,-4.05) 14(-2.25,-4.05) 15(-1.75,-4.05) 16(-1.25,-4.05) 17(-0.75,-4.05) 18(-0.25,-4.05) 19(0.25,-4.05) 20(0.75,-4.05) 21(1.25,-4.05) 22(1.75,-4.05) 23(2.25,-4.05) 24(2.75,-4.05) 37(2.75,4.05) 38(2.25,4.05) 39(1.75,4.05) 40(1.25,4.05) 41(0.75,4.05) 42(0.25,4.05) 43(-0.25,4.05) 44(-0.75,4.05) 45(-1.25,4.05) 46(-1.75,4.05) 47(-2.25,4.05) 48(-2.75,4.05)
  silkscreen extent -4.18,-2.75 2.75,3.57
PH2.0-4P [mm]
  rect 1.2x1.4 hole 0.8: 1(-3,0)
  oval 1.2x1.4 hole 0.8: 2(-1,0) 3(1,0) 4(3,0)
  silkscreen extent -5.01,-2.72 5,1.88
PH2.0-6P [mm]
  rect 1.2x1.4 hole 0.8: 1(-5,0)
  oval 1.2x1.4 hole 0.8: 2(-3,0) 3(-1,0) 4(1,0) 5(3,0) 6(5,0)
  silkscreen extent -7.01,-2.72 7,1.88
PH2.0-7P [mm]
  rect 1.2x1.4 hole 0.8: 1(-6,0)
  oval 1.2x1.4 hole 0.8: 2(-4,0) 3(-2,0) 4(0,0) 5(2,0) 6(4,0) 7(6,0)
  silkscreen extent -8.01,-2.72 8,1.88
PH2.0-8P [mm]
  rect 1.2x1.4 hole 0.8: 1(-7,0)
  oval 1.2x1.4 hole 0.8: 2(-5,0) 3(-3,0) 4(-1,0) 5(1,0) 6(3,0) 7(5,0) 8(7,0)
  silkscreen extent -9.01,-2.72 9,1.88
R2512 [mil]
  rect 80x125 smd: 1(0,0) 2(220,0)
  silkscreen extent -50,-73 270,73
"SMA DO-214AC" [mm]
  rect 2.2x1.6 smd: 1(-2.2,0) 2(2.2,0)
  silkscreen extent -2.54,-1.52 2.64,1.53
SO-8 [mil]
  oval 80x24 smd: 1(0,0) 2(0,-50) 3(0,-100) 4(0,-150) 5(246.18,-150) 6(246.18,-100) 7(246.18,-50) 8(246.18,0)
  silkscreen extent 51,-175 194,58
SO-14 [mil]
  oval 80x24 smd: 1(0,0) 2(0,-50) 3(0,-100) 4(0,-150) 5(0,-200) 6(0,-250) 7(0,-300) 8(253.66,-300) 9(253.66,-250) 10(253.66,-200) 11(253.66,-150) 12(253.66,-100) 13(253.66,-50) 14(253.66,0)
  silkscreen extent 75,-325 180,25
SOD523 [mm]
  rect 0.8x0.35 smd: 1(-0.762,0) 2(0.762,0)
  silkscreen extent -0.76,-0.51 0.76,0.51
SOP-20 [mil]
  oval 80x24 smd: 1(-169.29,225) 2(-169.29,175) 3(-169.29,125) 4(-169.29,75) 5(-169.29,25) 6(-169.29,-25) 7(-169.29,-75) 8(-169.29,-125) 9(-169.29,-175) 10(-169.29,-225) 11(169.29,-225) 12(169.29,-175) 13(169.29,-125) 14(169.29,-75) 15(169.29,-25) 16(169.29,25) 17(169.29,75) 18(169.29,125) 19(169.29,175) 20(169.29,225)
  silkscreen extent -149,-251 118,283
SOT23-5 [mil] "SOT23, 5-Leads, Body 3.1x3.0mm (max), Pitch 0.95mm, IPC Medium Density"
  rect 40x20 smd: 1(-55,37.4)
  oval 40x20 smd: 2(-55,0) 3(-55,-37.4) 4(55,-37.4) 5(55,37.4)
  silkscreen extent -59,-57 26,70
SOT-23_L [mm]
  rect 1x0.8 smd: 1(-1.1,0.953) 2(-1.1,-0.953) 3(1.1,-0.013)
  silkscreen extent -0.97,-1.46 1.14,1.71
SOT-523 [mm] "SOT23, 3-Leads, Body 1.7x1.8mm (max), Pitch 0.50mm, IPC Medium Density"
  rect 0.85x0.4 smd: 1(-0.825,0.5) 2(-0.825,-0.5) 3(0.825,0)
  silkscreen extent -0.25,-0.85 0.43,0.85
TO-252-2L [mm]
  rect 2.55x0.8 smd: 1(-4,2.3) 2(-4,-2.3)
  rect 6.25x5.55 smd: 3(2.15,0)
  silkscreen extent -5.12,-3.25 -1.35,3.32
TO-252-4L [mm]
  rect 2.55x0.7 smd: 1(0,0) 2(0,-1.27) 3(0,-3.81) 4(0,-5.08)
  rect 5.6x5.5 smd: 5(6.5,-2.54)
  silkscreen extent -1.12,-5.79 3.35,0.98
VH3.96-4P [mm]
  oct 2.6x2.6 hole 1.8: 1(-5.94,0)
  round 2.6 hole 1.8: 2(-1.98,0) 3(1.98,0) 4(5.94,0)
  silkscreen extent -8.02,-3.68 8.03,4.19
VH3.96-8P [mm]
  oct 2.6x2.6 hole 1.8: 1(-11.88,0)
  round 2.6 hole 1.8: 2(-7.92,0) 3(-3.96,0) 4(0,0) 5(3.96,0) 6(7.92,0) 7(11.88,0) 8(15.84,0)
  silkscreen extent -13.89,-4.8 17.84,4.97
XH2.54-2 [mm]
  rect 1.4x1.4 hole 1: 1(-1.27,0)
  round 1.4 hole 1: 2(1.27,0)
  silkscreen extent -3.81,-3.35 3.81,2.29
XH2.54-6 [mm]
  rect 1.4x1.4 hole 1: 1(-6.35,0)
  round 1.4 hole 1: 2(-3.81,0) 3(-1.27,0) 4(1.27,0) 5(3.81,0) 6(6.35,0)
  silkscreen extent -8.89,-3.35 8.76,2.29

## Part data
C1 C2: library part "Cap Pol3", "Polarized Capacitor (Surface Mount)"
C3 C4 C5 C6 C7 C8 C9 C10 C11 C12 C13 C14 C15 C16 C17 C18 C19 C20 C21 C22 C23 C24 C25 C26 C27 C28 C29 C30 C31 C32 C33 C34 C35 C36 C37 C38 C39 C40 C41 C42 C43 C44 C45 C46 C47 C48 C49 C50 C51 C52 C53 C54 C55 C56 C57 C58 C59 C60 C61 C62 C63 C64 C65 C66 C67 C68 C69 C70 C71 C72 C73 C74 C75: library part Cap, "Capacitor"
D1: library part LCTVS
D2 D3 D4 D5 D6 D7: library part DIODE, "Default Diode"
D8: library part "D Schottky", "Schottky Diode"
F1 F2: library part PPTC
J2: library part PH2.0-6P, "Header, 6-Pin"
J3 J7: "Header, 6-Pin"
J4: "Header, 7-Pin"
J5: library part XH2P, "Header, 2-Pin"
J6 J9: library part "Header 4", "Header, 4-Pin"
J8: "Header, 3-Pin"
Q1 Q2 Q5 Q6 Q9 Q10: library part MOS-DUAL-N/P
Q3 Q4 Q7 Q8 Q11 Q12 Q17 Q22 Q23 Q24 Q25: library part NPN, "NPN Bipolar Transistor"
Q13 Q14 Q15 Q16: library part MOS-P, "P-Channel MOSFET"
Q18 Q19 Q20 Q21: library part MOS-N, "N-Channel MOSFET"
R1 R2 R3 R4 R5 R6 R7 R8 R9 R10 R11 R12 R13 R14 R15 R16 R17 R18 R19 R20 R21 R22 R23 R24 R25 R26 R27 R28 R29 R30 R31 R32 R33 R34 R35 R36 R37 R38 R39 R40 R41 R42 R43 R44 R45 R46 R47 R48 R49 R50 R51 R52 R53 R54 R55 R56 R57 R58 R59 R60 R61 R62 R63 R64 R65 R66 R67 R68 R69 R70 R71 R72 R73 R74 R75 R76 R77 R78 R79 R80 R81 R82 R83 R84 R85 R86 R87 R88 R89 R90 R91 R92 R93 R94 R95 R96 R97 R98 R99 R100 R101 R102 R103 R104 R105 R106 R107 R108 R109 R110 R111 R112 R113 R114 R115 R116 R117 R118 R119 R120 R121 R122 R123 R124 R125 R126 R127 R128 R129 R130 R131 R132 R133 R134 R135 R136 R137 R138 R139 R140 R141 R142 R143 R144 R145 R146 R147 R148: library part Res1, "Resistor"
U1 U5 U7: library part SN74AHCT08N, "Quadruple 2-Input Positive-AND Gate"
U2: library part SN74ACT14N, "Hex Schmitt-Trigger Inverter"
U3 U9 U10 U11 U12 U13: library part OP
U4: library part XC9216A33
U6: library part STM32F103C8T6, "STM32 ARM-based 32-bit MCU with 64 Kbytes Flash, 48-pin LQFP, Industrial Temperature"
U8: library part 74HC245
X1: library part XTAL

## Via types
v1: diameter 0.6, hole 0.3, Top Layer to Bottom Layer, tented both sides, 393 vias
v2: diameter 0.6, hole 0.3, Top Layer to Bottom Layer, 11 vias

## Nets (pads, with @x,y where several pads share a name; then routed paths per layer and width w, separated by ;. In a path a pad name is that pad's centre, name@x,y a point inside that pad or via, vN(x,y) a via of type N, cw(c..) or ccw(c..) an arc to the next point about the centre after c; other vN are vias at no path point)
3.3V: C15.1 C16.2 C17.2 C19.1 C30.1 C31.1 C41.1 C46.1 C50.1 D2.2 D5.2 J6.1 R5.2 R35.2 R37.2 R38.2 R39.2 R40.2 R41.2 R42.2 R43.2 R44.2 R64.2 R78.1 R80.1 R111.2 R119.2 R129.1 R131.2 R132.2 R133.2 R139.2 R140.2 R141.2 R142.2 R143.2 U4.5 U6.1 U6.9 U6.24 U6.48 U8.20 U9.8 U10.8 | length 251
  Top Layer w0.254: R111.2@20.091,51.905 20.091,52.222 20.701,52.832 v1(25.273,52.832) ; R119.2@20.295,38.481 20.295,39.218 21.285,40.208 U10.8@21.285,41.143 ; v1(21.844,77.724) 21.844,67.564 22.267,67.141 R143.2@23.126,67.141 24.591,68.605 R133.2@24.676,68.605 25.248,68.605 v1(25.654,68.199) ; v1(22.987,79.629) 22.606,80.01 22.606,84.405 R132.2@23.952,85.75 ; 23.114,74.295 23.114,73.012 R131.2@23.126,73 23.126,76.442 v1(23.114,76.454) ; v1(27.432,28.956) 27.432,27.953 D2.2@27.483,27.902 ; D5.2@27.483,31.89 v1(27.483,32.766) ; v1(29.083,68.072) 30.607,69.596 ; 30.915,69.904 30.607,69.596 ; R140.2@30.915,70.704 R140.2@31.229,71.018 ; v1(30.988,84.455) 30.988,84.874 31.94,85.827 R44.2@31.94,85.661 ; R139.2@35.751,60.096 35.751,60.516 36.322,61.087 36.322,65.532 36.83,66.04 36.83,69.467 38.28,70.917 R142.2@39.306,70.917 ; v1(37.211,35.941) 37.839,35.313 U6.24@37.839,34.251 ; 38.227,70.97 v1(38.227,71.882) ; R43.2@38.938,75.323 38.938,74.752 38.735,74.549 v1(38.227,74.549) 38.225,74.547 36.955,74.547 35.814,73.406 32.258,73.406 31.229,72.377 R140.2@31.229,71.018 ; R43.2@39.141,75.323 40.144,75.323 40.513,75.692 40.513,80.772 v1(39.37,81.915) ; U6.48@43.339,26.151 43.339,27.21 43.58,27.451 U6.1@44.639,27.451 45.828,27.451 46.355,26.924 46.355,26.035 44.958,24.638 C31.1@44.958,22.06 ; U6.9@44.639,31.451 48.088,31.451 v1(48.641,32.004) ; C31.1@44.704,22.06 C31.1@44.958,22.06 ; C30.1@46.152,22.06 C30.1@46.126,22.06 C31.1@44.958,22.06 ; v1(56.896,14.351) R129.1@58.128,14.351 ; v1(58.42,25.146) R78.1@59.448,25.146 ; v1(67.945,24.765) 68.859,25.679 U9.8@70.083,25.679 71.12,25.679 ; C46.1@71.209,28.296 71.209,25.769 71.12,25.679 ; R80.1@72.91,25.476 72.707,25.679 71.12,25.679 ; R42.2@76.682,20.701 76.962,20.981 v1(76.962,21.717) ; R39.2@82.896,12.802 82.921,12.827 v1(83.947,12.827) ; R40.2@82.905,16.5 82.915,16.51 v1(83.947,16.51) ; R37.2@82.908,6.162 v1(83.962,6.162) ; R38.2@82.908,9.591 v1(83.987,9.591) ; R41.2@82.908,19.7 83.932,19.7 v1(83.947,19.685) ; 30.607,69.596 31.229,70.218 R140.2@31.229,71.018
  Top Layer w0.5: U10.8@21.285,41.143 23.825,41.143 24.633,41.143 25.781,42.291 v1(27.94,42.291) ; v1(35.56,20.701) 35.548,20.689 35.548,19.812 C16.2@35.548,18.847 36.347,18.047 U4.5@36.347,16.647 37.074,16.647 38.506,15.215 C17.2@38.506,12.955 R5.2@39.929,12.955 C15.1@41.351,12.955 v1(42.418,12.954) v1(43.307,12.954) 46.59,16.237 46.736,16.383 v1(47.752,16.383) ; R139.2@35.751,60.096 36.678,60.096 v1(36.703,60.071) ; v1(38.354,60.071) R141.2@39.382,60.071 ; C30.1@46.126,22.06 47.028,22.06 47.371,21.717 47.371,19.812 48.768,18.415 48.768,17.399 v1(47.752,16.383) ; J6.1@51.616,4.343 52.591,5.319 C19.1@52.591,8.915 ; R64.2@57.01,4.293 57.01,5.601 53.721,8.89 52.616,8.89 C19.1@52.591,8.915 ; U8.20@76.137,15.169 76.137,16.18 C41.1@76.137,17.348 ; v1(47.752,16.383) 52.591,11.544 C19.1@52.591,8.915
  VCC-A w0.254: v1(25.654,68.199) 25.781,68.072 v1(29.083,68.072)
  Bottom Layer w0.254: v1(21.844,77.724) 22.225,78.105 23.114,78.105 ; v1(22.987,79.629) 23.114,79.502 23.114,78.105 ; v1(23.114,76.454) 23.114,78.105 ; v1(25.273,52.832) 27.94,52.832 ; v1(30.988,84.455) 37.338,84.455 ; v1(38.227,71.882) v1(38.227,74.549) ; 38.604,83.189 37.338,84.455 ; 38.964,82.829 39.37,82.423 ; v1(39.37,81.915) 39.37,82.423 ; 37.338,84.455 39.37,82.423
  Bottom Layer w0.5: v1(27.432,28.956) 27.94,28.956 ; v1(27.483,32.766) 27.94,32.766 ; 28.702,27.559 29.083,27.178 ; v1(35.56,19.812) v1(35.56,20.701) 29.083,27.178 ; v1(38.354,60.071) v1(36.703,60.071) 30.226,60.071 27.94,57.785 27.94,52.832 v1(27.94,42.291) 27.94,32.766 ; 27.94,28.956 27.94,28.321 29.083,27.178 ; 27.94,28.956 27.94,32.766
  other v1: 76.124,16.18
24V: C1.1 C3.1 C47.1 C48.1 F1.1 Q13.2 Q14.2 Q15.2 Q16.2 R86.2 R87.2 R88.2 R89.2 R90.2 R91.2 R92.2 | length 65.9
  Top Layer w0.254: v1(15.113,30.353) 15.138,30.378 R92.2@21.514,30.378 ; R91.2@87.741,80.366 89.789,80.366 89.814,80.366 89.916,80.264 ; R88.2@87.766,26.899 89.814,26.899 90.018,26.695 90.17,26.543 ; R89.2@87.766,45.949 89.789,45.949 89.941,45.949 90.17,45.72 ; R90.2@87.817,65.303 89.84,65.303 90.018,65.303 90.056,65.265 90.17,65.151
  Top Layer w1.5: C47.1@76.327,50.873 77.724,50.873 C48.1@79.121,50.873
  Top Layer w2.5: 3.556,65.024 3.556,64.745 3.556,63.881 3.556,62.357 2.032,60.833 2.032,47.244 6.147,43.129 F1.1@6.147,29.591
  Bottom Layer w0.254: F1.1@6.147,29.591 6.909,30.353 v1(15.113,30.353)
  other v1: 89.865,25.73 90.729,25.73 91.592,25.73 89.865,26.543 90.729,26.543 91.592,26.543 89.789,45.237 90.653,45.237 91.516,45.237 89.789,46.05 90.653,46.05 91.516,46.05 77.724,50.444 77.724,51.308 3.175,63.881 3.988,63.881 3.175,64.745 3.988,64.745 89.84,65.049 90.703,65.049 91.567,65.049 3.175,65.608 3.988,65.608 89.84,65.862 90.703,65.862 91.567,65.862 89.789,79.908 90.653,79.908 91.516,79.908 89.789,80.721 90.653,80.721 91.516,80.721 85.547,86.03 86.36,86.03 85.547,86.893 86.36,86.893 85.547,87.757 86.36,87.757 90.094,90.703 90.957,90.703 91.821,90.703 90.094,91.516 90.957,91.516 91.821,91.516
ADC-H-IN: C25.1 R27.1 U10.3 | length 39.3
  Top Layer w0.254: R27.1@1.844,73.003 C25.1@3.266,73.003 3.266,70.612 ; 3.266,69.759 3.266,70.612 ; 16.002,60.833 16.002,60.452 ; U10.3@18.745,47.447 18.745,48.641 18.44,48.946 16.84,48.946 16.002,49.784 16.002,60.452 ; 3.266,70.612 3.266,68.997 8.382,63.881 14.732,63.881 16.002,62.611 16.002,60.452
ADC-HEAD: C53.1 R118.2 U6.19 | length 35.1
  Top Layer w0.254: R118.2@21.514,51.905 C53.1@22.936,51.905 23.279,51.905 24.257,50.927 29.083,50.927 29.845,50.165 v1(29.845,42.545) ; v1@29.845,40.767 39.497,40.767 40.339,39.925 U6.19@40.339,34.251
  Bottom Layer w0.254: v1(29.718,40.64) 29.845,40.767 v1(29.845,42.545)
ADC-L: C61.1 R79.2 U6.10 | length 21.1
  Top Layer w0.254: U6.10@44.639,31.951 46.937,31.951 49.911,34.925 53.848,34.925 59.448,29.325 C61.1@59.448,27.991 R79.2@59.448,26.568
ADC-L-IN: C51.1 R116.2 U9.3 | length 28.1
  Top Layer w0.254: U9.3@63.83,23.139 v1(65.608,23.139) ; R116.2@85.899,33.973 C51.1@85.899,32.55 85.899,31.424 v1(85.903,31.42)
  Bottom Layer w0.254: v1(65.608,23.139) 77.622,23.139 v1(85.903,31.42)
ADC-R: C62.1 R81.1 U6.11 | length 34.5
  Top Layer w0.254: U6.11@44.639,32.451 46.675,32.451 49.657,35.433 54.229,35.433 59.436,30.226 72.136,30.226 72.91,29.452 C62.1@72.91,28.321 R81.1@72.91,26.899
ADC-R-IN: C52.1 R117.2 U9.5 | length 45.6
  Top Layer w0.254: v1(67.793,28.321) 66.802,27.33 66.802,23.876 68.809,21.869 U9.5@70.083,21.869 ; v1(84.557,45.288) 84.557,50.753 R117.2@85.592,51.789 C52.1@85.592,53.211
  Bottom Layer w0.254: v1(67.793,28.321) 70.46,30.988 77.978,30.988 84.557,37.567 v1(84.557,45.288)
ADC-W-IN: C44.1 R76.1 U10.5 | length 53.7
  Top Layer w0.254: C44.1@15.646,41.898 15.659,41.91 U10.5@17.475,41.91 ; U10.5@17.475,41.143 U10.5@17.475,41.91 ; v1(29.083,49.657) 24.003,44.577 19.431,44.577 17.475,42.621 U10.5@17.475,41.91 ; v1(29.083,55.372) 43.688,55.372 46.228,57.912 R76.1@46.228,69.85
  Bottom Layer w0.254: v1(29.083,49.657) v1(29.083,55.372)
ADC-WING: C54.1 R122.1 U6.18 | length 26.8
  Top Layer w0.254: R122.1@21.717,38.481 C54.1@23.139,38.481 25.527,38.481 28.448,41.402 39.624,41.402 40.839,40.187 U6.18@40.839,34.251
DIR1N: R98.1 U1.2 U2.2 | length 34.3
  Top Layer w0.254: U2.2@58.242,46.761 58.242,47.955 58.801,48.514 60.706,48.514 v1(64.643,44.577) ; v1(66.04,43.053) 67.615,43.053 U1.2@67.64,43.078 ; v1(77.978,38.227) 78.689,37.516 R98.1@84.921,37.516
  Bottom Layer w0.254: v1(64.643,44.577) 66.04,43.18 v1(66.04,43.053) 67.437,43.053 72.22,38.27 77.935,38.27 v1(77.978,38.227)
DIR2N: R100.1 U1.10 U2.4 | length 64.7
  Top Layer w0.254: U2.4@55.702,46.761 55.702,47.574 57.658,49.53 79.629,49.53 ; U1.10@74.083,39.268 76.606,39.268 v1(77.851,40.513) ; v1(79.629,48.133) 79.629,49.53 ; R100.1@84.896,71.45 84.896,71.307 81.026,67.437 81.026,50.038 80.518,49.53 79.629,49.53
  Bottom Layer w0.254: v1(77.851,40.513) 78.74,40.513 79.629,41.402 v1(79.629,48.133)
DIR3N: R25.1 U2.6 U5.5 | length 53.5
  Top Layer w0.254: R25.1@13.311,69.7 13.311,68.731 27.686,54.356 39.37,54.356 v1(39.624,54.61) ; U5.5@39.599,51.105 v1(39.599,52.426) v1@39.624,52.451 ; v1(52.578,48.641) 53.162,48.057 U2.6@53.162,46.761
  Bottom Layer w0.254: v1(39.624,54.61) 39.624,52.451 40.259,51.816 49.403,51.816 v1(52.578,48.641)
DIR4N: R51.1 U2.8 U5.10 | length 43.1
  Top Layer w0.254: v1@39.599,43.078 39.599,43.18 U5.10@39.599,44.662 ; v1(44.831,41.783) 46.609,41.783 49.022,44.196 ; U2.8@51.892,40.318 51.892,41.326 49.022,44.196 ; R51.1@57.785,65.646 57.785,65.024 49.149,56.388 49.149,44.323 49.022,44.196
  Bottom Layer w0.254: v1(39.624,43.18) 40.132,43.688 42.926,43.688 v1(44.831,41.783)
DIR5N: R69.1 U2.10 U7.5 | length 40.8
  Top Layer w0.254: U2.10@54.432,40.318 v1(54.432,44.298) ; U7.5@59.893,58.776 59.944,58.826 59.944,59.817 v1(60.833,60.706) ; v1(67.437,60.833) 69.342,60.833 74.155,65.646 R69.1@74.244,65.646
  Bottom Layer w0.254: v1(54.432,44.298) 54.432,54.305 v1(60.833,60.706) 60.96,60.833 v1(67.437,60.833)
DIR-IO-1: R102.2 U1.4 U2.1 U6.29 | length 68.2
  Top Layer w0.254: U6.29@36.539,30.951 37.555,30.951 39.014,32.41 v1(41.453,32.41) ; U2.1@59.563,45.974 60.579,45.974 v1(64.389,42.164) ; v1(66.015,40.538) U1.4@67.64,40.538 69.063,40.538 71.12,38.481 71.12,33.528 74.041,30.607 81.661,30.607 82.753,29.515 R102.2@82.753,28.461
  Bottom Layer w0.254: v1(41.453,32.41) 41.453,33.452 43.18,35.179 47.117,35.179 55.118,43.18 59.436,43.18 59.817,43.561 62.992,43.561 v1(64.389,42.164) v1(66.015,40.538)
DIR-IO-2: R99.2 U1.12 U2.3 U6.39 | length 79.3
  Top Layer w0.254: U6.39@38.839,26.151 38.862,26.174 38.862,27.305 39.243,27.686 40.513,27.686 41.91,29.083 41.91,31.115 42.85,32.055 v1(42.85,32.537) ; v1(56.972,42.291) U2.3@56.972,46.761 56.972,47.955 58.039,49.022 73.787,49.022 75.819,46.99 v1(75.819,41.783) 75.794,41.808 U1.12@74.083,41.808 ; v1(77.724,41.783) 77.724,44.323 82.042,48.641 82.042,53.56 R99.2@84.972,56.49
  Bottom Layer w0.254: v1(42.85,32.537) 47.219,32.537 v1(56.972,42.291) ; v1(75.819,41.783) v1(77.724,41.783)
DIR-IO-3: R26.2 U2.5 U5.1 U6.20 | length 88.2
  Top Layer w0.254: 5.69,68.402 R26.2@5.69,69.659 5.69,68.224 9.017,64.897 15.367,64.897 27.051,53.213 v1(41.021,53.213) ; v1(39.624,39.37) 39.839,39.155 U6.20@39.839,34.251 ; U5.1@44.679,51.105 v1@44.679,53.188 ; v1(53.086,43.282) 53.086,44.704 54.432,46.05 U2.5@54.432,46.761 54.432,49.2 v1(53.213,50.419)
  Bottom Layer w0.254: v1(39.624,39.37) 49.174,39.37 v1(53.086,43.282) ; v1(41.021,53.213) 44.602,53.213 v1(44.628,53.238) 50.394,53.238 v1(53.213,50.419)
DIR-IO-4: R52.2 U2.9 U5.12 U6.21 | length 49.5
  Top Layer w0.254: v1(39.116,38.608) 39.339,38.385 U6.21@39.339,34.251 ; v1(41.529,42.672) 42.139,43.282 U5.12@42.139,44.662 42.139,46.203 42.672,46.736 47.371,46.736 v1(47.752,47.117) ; v1(47.752,49.53) 48.133,49.911 48.133,64.376 R52.2@49.403,65.646 ; v1(51.943,44.704) 51.943,43.307 53.111,42.139 53.111,40.369 U2.9@53.162,40.318
  Bottom Layer w0.254: v1(39.116,38.608) 38.862,38.862 38.862,39.878 v1@41.529,42.545 ; v1(47.752,49.53) v1(47.752,47.117) 50.927,47.117 51.943,46.101 v1(51.943,44.704)
DIR-IO-5: R70.2 U2.11 U6.22 U7.1 | length 55.7
  Top Layer w0.254: v1(38.608,37.211) 38.839,36.98 U6.22@38.839,34.251 ; v1(43.561,37.338) 44.704,38.481 55.372,38.481 55.702,38.811 U2.11@55.702,40.318 v1(55.702,44.348) ; v1(55.753,49.022) 55.753,52.959 58.107,55.313 64.33,55.313 64.973,55.956 U7.1@64.973,58.776 64.973,60.655 65.913,61.595 v1(65.913,62.865) ; v1(65.913,64.516) 65.913,65.544 R70.2@66.015,65.646
  Bottom Layer w0.254: v1(38.608,37.211) 38.735,37.338 v1(43.561,37.338) ; v1(55.702,44.348) 55.702,49.022 55.702,49.073 v1(55.753,49.022) ; v1(65.913,62.865) v1(65.913,64.516)
ENC-HEAD-A: C64.1 R43.1 R135.1 U3.1 U6.35 | length 71.9
  Top Layer w0.254: v1(32.639,29.972) 34.66,27.951 U6.35@36.539,27.951 ; v1(35.56,56.261) 35.56,56.388 33.782,58.166 30.219,58.166 27.74,60.645 27.74,67.865 30.245,70.37 30.245,75.076 30.582,75.413 U3.1@31.267,75.413 31.267,74.397 31.775,73.889 35.655,73.889 37.115,75.349 C64.1@37.338,75.349 37.385,75.349 38.909,76.873 38.938,76.873 38.938,77.355 R135.1@37.389,78.905
  Bottom Layer w0.254: v1(32.639,29.972) 32.258,30.353 32.258,39.116 35.687,42.545 35.687,56.261 v1(35.56,56.261)
ENC-HEAD-A1: C9.1 J2.5 R4.1 R135.2 U3.3 | length 27.5
  Top Layer w0.254: J2.5@32.385,96.952 32.385,95.377 34.823,92.939 R4.1@34.823,91.072 C9.1@36.246,91.072 38.608,88.71 38.608,81.674 R135.2@37.389,80.455 36.513,80.455 33.807,77.749 U3.3@33.807,75.413
ENC-HEAD-B: C65.1 R44.1 R137.1 U3.7 U6.36 | length 74.9
  Top Layer w0.254: v1(31.623,29.718) 33.89,27.451 U6.36@36.539,27.451 ; U3.7@32.537,80.67 U3.7@32.537,81.666 ; R44.1@33.49,85.827 R44.1@33.668,85.827 35.09,85.827 C65.1@35.09,83.998 ; v1(34.417,56.388) 33.274,57.531 30.099,57.531 27.286,60.344 27.286,68.06 27.879,68.653 27.886,68.653 29.791,70.558 29.791,76.527 32.537,79.273 U3.7@32.537,81.666 ; C65.1@35.242,83.998 34.253,83.009 33.225,83.009 32.537,82.321 U3.7@32.537,81.666
  Bottom Layer w0.254: v1@31.496,29.718 31.496,39.37 34.925,42.799 34.925,55.88 v1(34.417,56.388)
ENC-HEAD-B1: C8.1 J2.4 R3.1 R137.2 U3.5 | length 22
  Top Layer w0.254: J2.4@29.845,96.952 29.845,94.361 31.191,93.015 R3.1@31.191,91.072 C8.1@32.614,91.072 33.782,89.904 33.782,88.684 36.64,85.827 R137.2@36.767,85.827 37.617,85.827 37.846,85.598 37.846,82.931 36.581,81.666 U3.5@35.077,81.666
ENC-L-A: U6.33 U8.5 | length 40
  Top Layer w0.254: U6.33@36.539,28.951 40.635,28.951 v1(40.767,29.083) ; v1(53.721,20.066) 54.356,20.066 56.261,18.161 59.309,18.161 65.151,12.319 65.151,10.795 65.913,10.033 U8.5@67.48,10.033
  Bottom Layer w0.254: v1(40.767,29.083) 41.021,29.337 43.688,29.337 52.959,20.066 v1(53.721,20.066)
ENC-L-A-J: C33.1 J7.2 R37.1 U8.15 | length 36
  Top Layer w0.254: U8.15@76.08,8.763 78.994,8.763 81.358,6.399 R37.1@81.358,6.162 ; C33.1@81.358,4.739 R37.1@81.358,6.162 ; J7.2@106.731,12.628 103.179,12.628 100.584,10.033 88.646,10.033 85.852,7.239 82.435,7.239 R37.1@81.358,6.162
ENC-L-B: U6.32 U8.4 | length 39.2
  Top Layer w0.254: U6.32@36.539,29.451 39.611,29.451 v1(40.132,29.972) ; v1(54.61,20.828) 56.642,18.796 59.563,18.796 65.913,12.446 65.913,11.938 66.548,11.303 U8.4@67.48,11.303
  Bottom Layer w0.254: v1(40.132,29.972) 43.942,29.972 53.086,20.828 v1(54.61,20.828)
ENC-L-B-J: C34.1 J7.3 R38.1 U8.16 | length 34.3
  Top Layer w0.254: U8.16@76.08,10.033 78.867,10.033 79.309,9.591 R38.1@81.358,9.591 ; C34.1@81.358,8.168 R38.1@81.358,9.591 ; J7.3@106.731,14.628 104.417,14.628 100.33,10.541 82.308,10.541 R38.1@81.358,9.591
ENC-R-A: U6.31 U8.3 | length 38.8
  Top Layer w0.254: U6.31@36.539,29.951 38.714,29.951 39.497,30.734 v1(40.894,30.734) ; v1(53.721,21.717) 54.737,21.717 57.023,19.431 59.944,19.431 66.802,12.573 U8.3@67.48,12.573
  Bottom Layer w0.254: v1(40.894,30.734) 44.069,30.734 53.086,21.717 v1(53.721,21.717)
ENC-R-A-J: C36.1 J7.5 R40.1 U8.17 | length 35.8
  Top Layer w0.254: U8.17@76.08,11.303 76.962,11.303 80.518,14.859 81.355,14.859 C36.1@81.407,14.859 ; R40.1@81.355,16.5 C36.1@81.355,15.077 82.208,14.224 102.108,14.224 106.512,18.628 J7.5@106.731,18.628
ENC-R-B: U6.30 U8.2 | length 38.8
  Top Layer w0.254: U6.30@36.539,30.451 37.817,30.451 38.964,31.598 v1(40.564,31.598) ; v1(54.737,22.606) 57.277,20.066 60.325,20.066 66.548,13.843 U8.2@67.48,13.843
  Bottom Layer w0.254: v1(40.564,31.598) 44.094,31.598 53.086,22.606 v1(54.737,22.606)
ENC-R-B-J: C37.1 J7.6 R41.1 U8.18 | length 40.7
  Top Layer w0.254: U8.18@76.08,12.573 77.089,12.573 78.74,14.224 78.74,17.272 79.238,17.77 80.85,17.77 C37.1@81.358,18.278 ; R41.1@81.358,19.7 C37.1@81.358,18.278 ; J7.6@106.731,20.628 105.537,19.434 105.537,18.542 101.727,14.732 86.868,14.732 84.201,17.399 82.236,17.399 C37.1@81.358,18.278
ENC-W-L: C70.1 R139.1 R144.1 U6.40 U12.1 | length 55.1
  Top Layer w0.254: C70.1@29.107,63.143 29.999,62.251 U12.1@31.547,62.251 31.547,60.834 31.038,60.325 R144.1@31.038,60.096 31.038,59.64 31.496,59.182 34.163,59.182 ; R139.1@34.201,60.096 34.201,59.22 34.163,59.182 ; v1(36.957,23.749) 38.608,23.749 39.339,24.48 U6.40@39.339,26.151 ; v1(37.465,56.261) 37.465,56.896 35.179,59.182 34.163,59.182
  Bottom Layer w0.254: v1(36.957,23.749) 35.814,23.749 33.782,25.781 33.782,38.608 37.211,42.037 37.211,55.753 37.465,56.007 v1(37.465,56.261)
ENC-W-L1: C22.1 J3.3 R15.1 R144.2 U12.3 | length 48.1
  Top Layer w0.254: R144.2@32.588,60.096 34.087,61.595 U12.3@34.087,62.251 34.087,64.059 36.322,66.294 36.322,69.723 37.592,70.993 37.592,72.39 38.535,73.333 40.694,73.333 43.18,75.819 43.18,85.09 46.101,88.011 46.101,90.119 C22.1@45.085,91.135 ; R15.1@43.637,91.135 44.907,91.135 44.996,91.224 50.562,96.79 J3.3@50.562,97.333
ENC-W-R: C73.1 R141.1 R145.1 U6.41 U13.1 | length 53.4
  Top Layer w0.254: v1(35.306,26.543) 35.306,24.13 36.449,22.987 39.243,22.987 39.839,23.583 U6.41@39.839,26.151 ; C73.1@37.567,62.065 C73.1@37.795,62.065 40.195,62.065 U13.1@40.195,61.405 ; v1(39.37,56.261) 39.37,57.658 40.958,59.246 R141.1@40.958,60.096 ; U13.1@40.361,62.23 40.361,61.239 40.958,60.642 R141.1@40.958,60.096 ; R145.1@42.583,60.096 R141.1@40.958,60.096
  Bottom Layer w0.254: v1(35.306,26.543) 35.306,38.1 38.735,41.529 38.735,55.245 39.37,55.88 v1(39.37,56.261)
ENC-W-R1: C24.1 J4.3 R17.1 R145.2 U13.3 | length 59.7
  Top Layer w0.254: R145.2@44.133,60.096 42.901,61.329 U13.3@42.901,62.23 42.901,63.602 44.958,65.659 44.958,85.217 45.974,86.233 51.562,86.233 53.467,88.138 53.467,90.678 52.997,91.148 C24.1@52.375,91.148 ; R17.1@50.952,91.148 C24.1@52.375,91.148 ; v1(53.34,94.488) 52.375,93.523 C24.1@52.375,91.148
  Bottom Layer w0.254: v1(53.34,94.488) 64.262,94.488 65.996,96.222 J4.3@65.996,97.333
FAULT: D3.1 D4.1 Q25.3 R129.2 U6.4 | length 31.5
  Top Layer w0.254: U6.4@44.639,28.951 47.122,28.951 49.403,26.67 49.403,21.209 54.483,16.129 58.166,16.129 59.678,14.617 R129.2@59.678,14.351 58.75,13.424 D4.1@58.75,12.751 D3.1@58.75,11.379 57.117,9.746 Q25.3@57.117,8.369